# Altium PCB PCB1.PcbDoc (part 1 of 2)
Units mil, origin at the board's own origin, x right, y up, seen from the top; angles counter-clockwise.
Board outline 3937.01 x 3937.01 mil, 4 copper layers (Top Layer, Int1 (GND), Int2 (PWR), Bottom Layer), stack 61.754 mil thick; 139 components, 114 nets, 575 pads, 284 vias.
Unrouted connection lines stored in the file: 12.
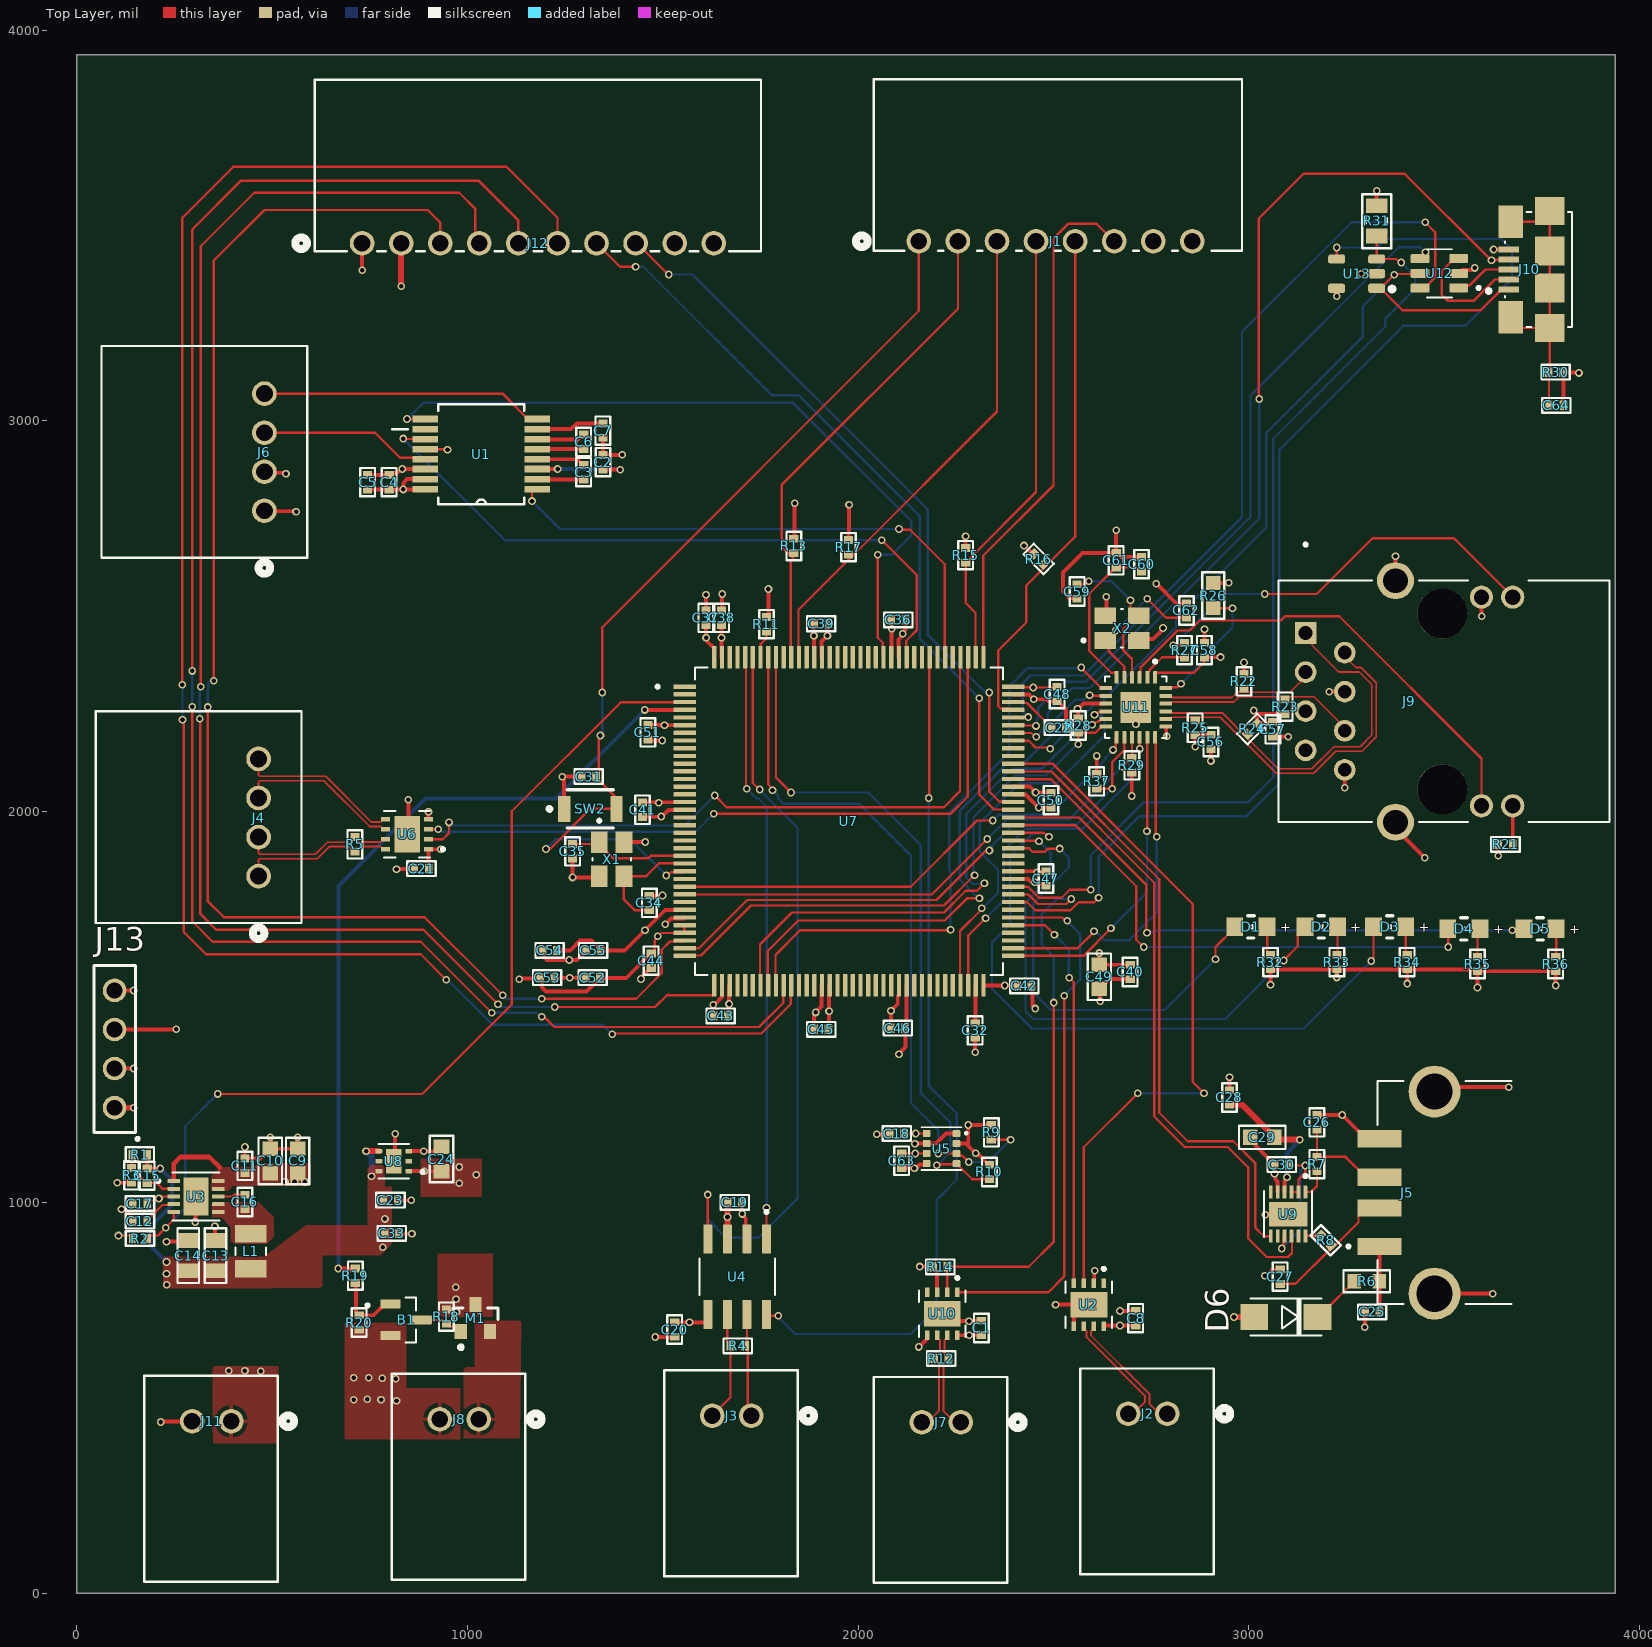
[diagram p0: Top Layer view]
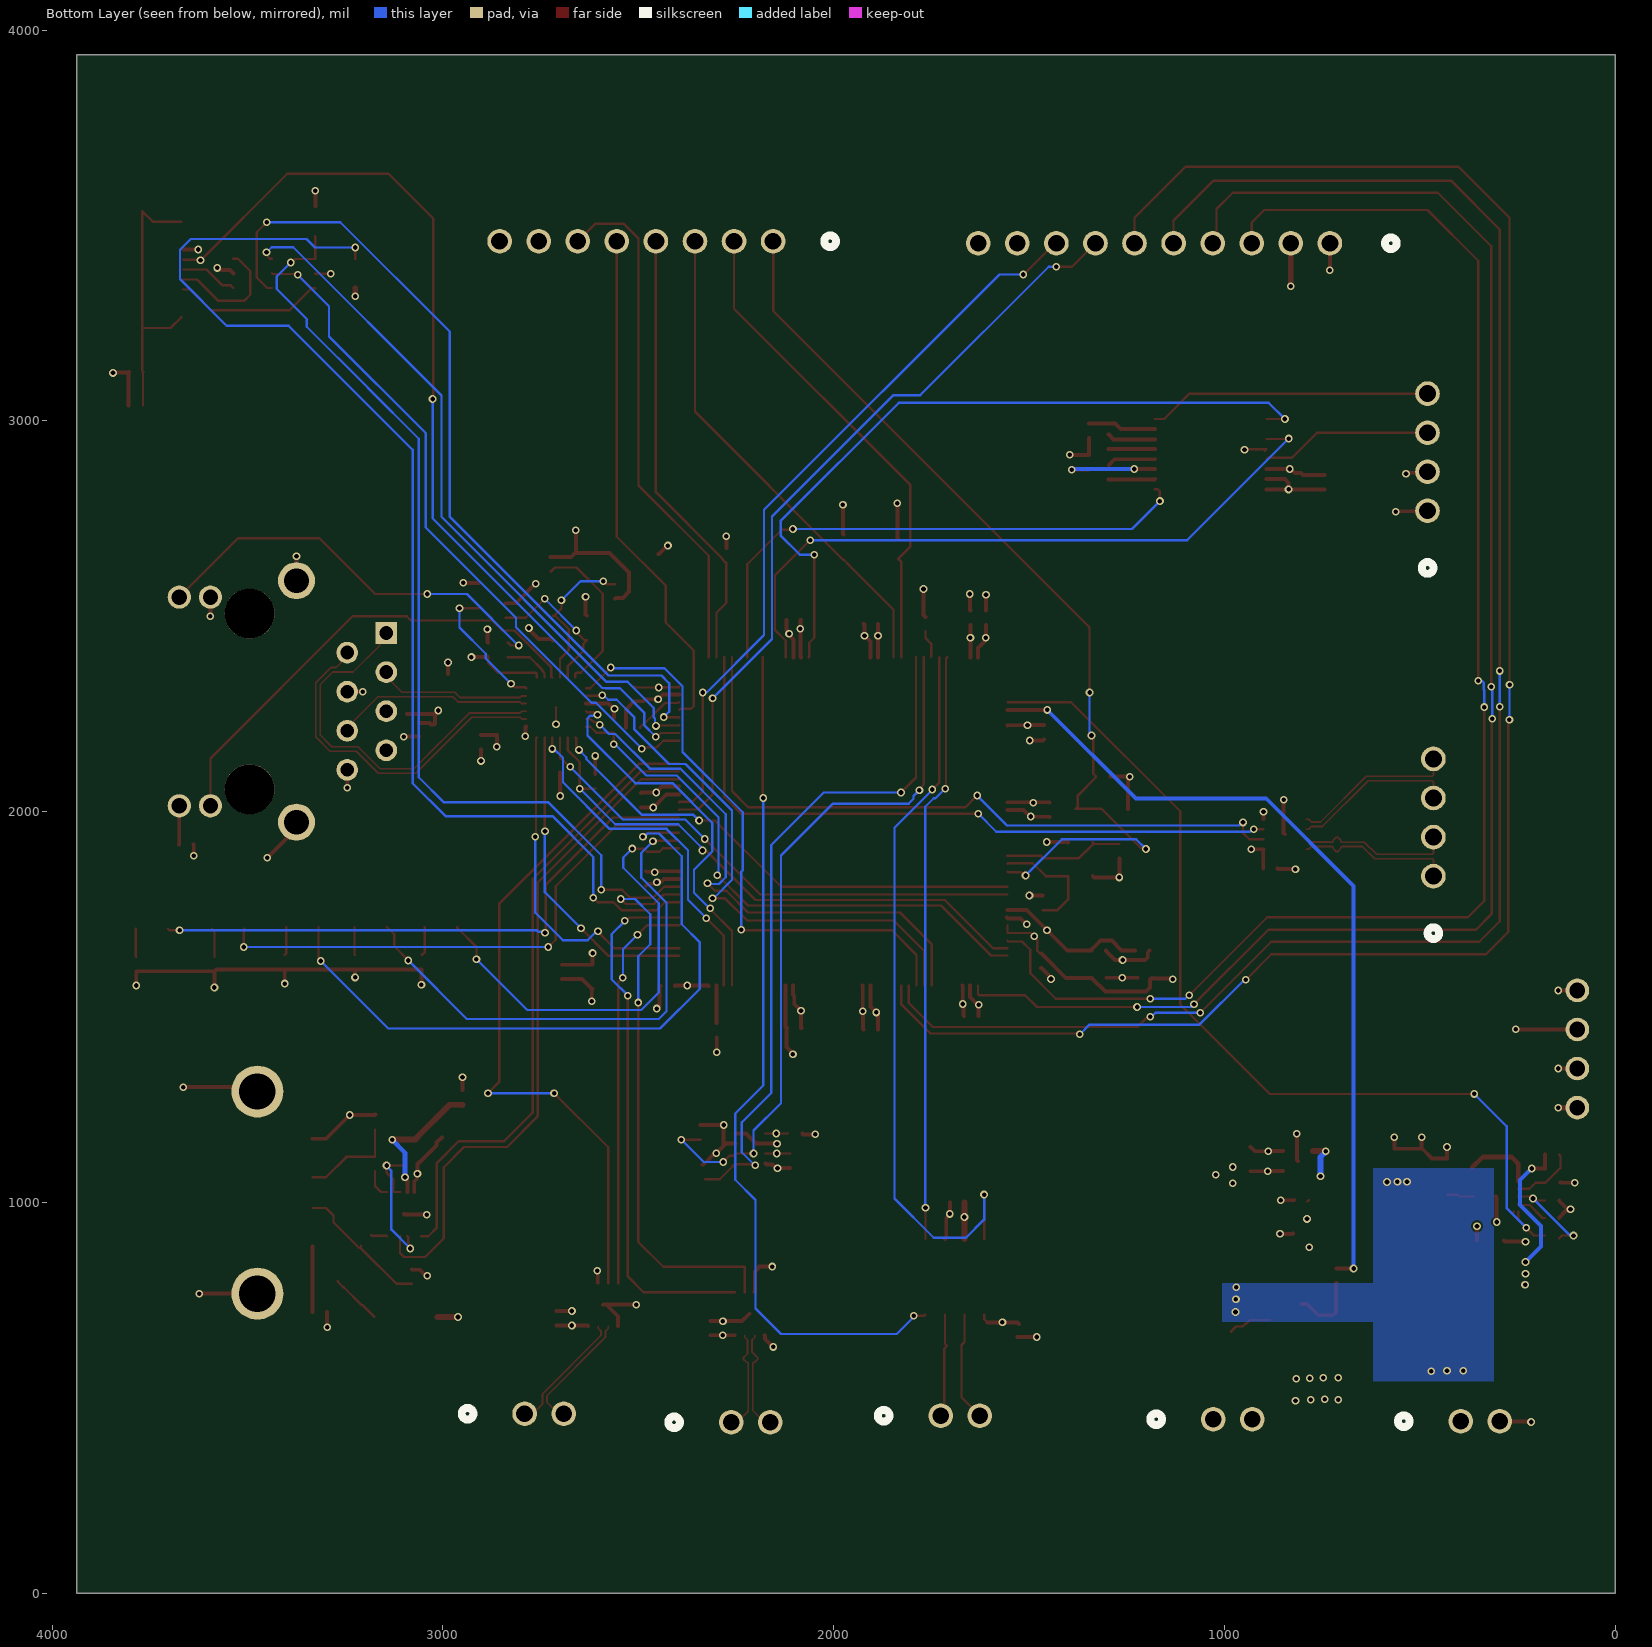
[diagram p1: Bottom Layer view, seen from below]
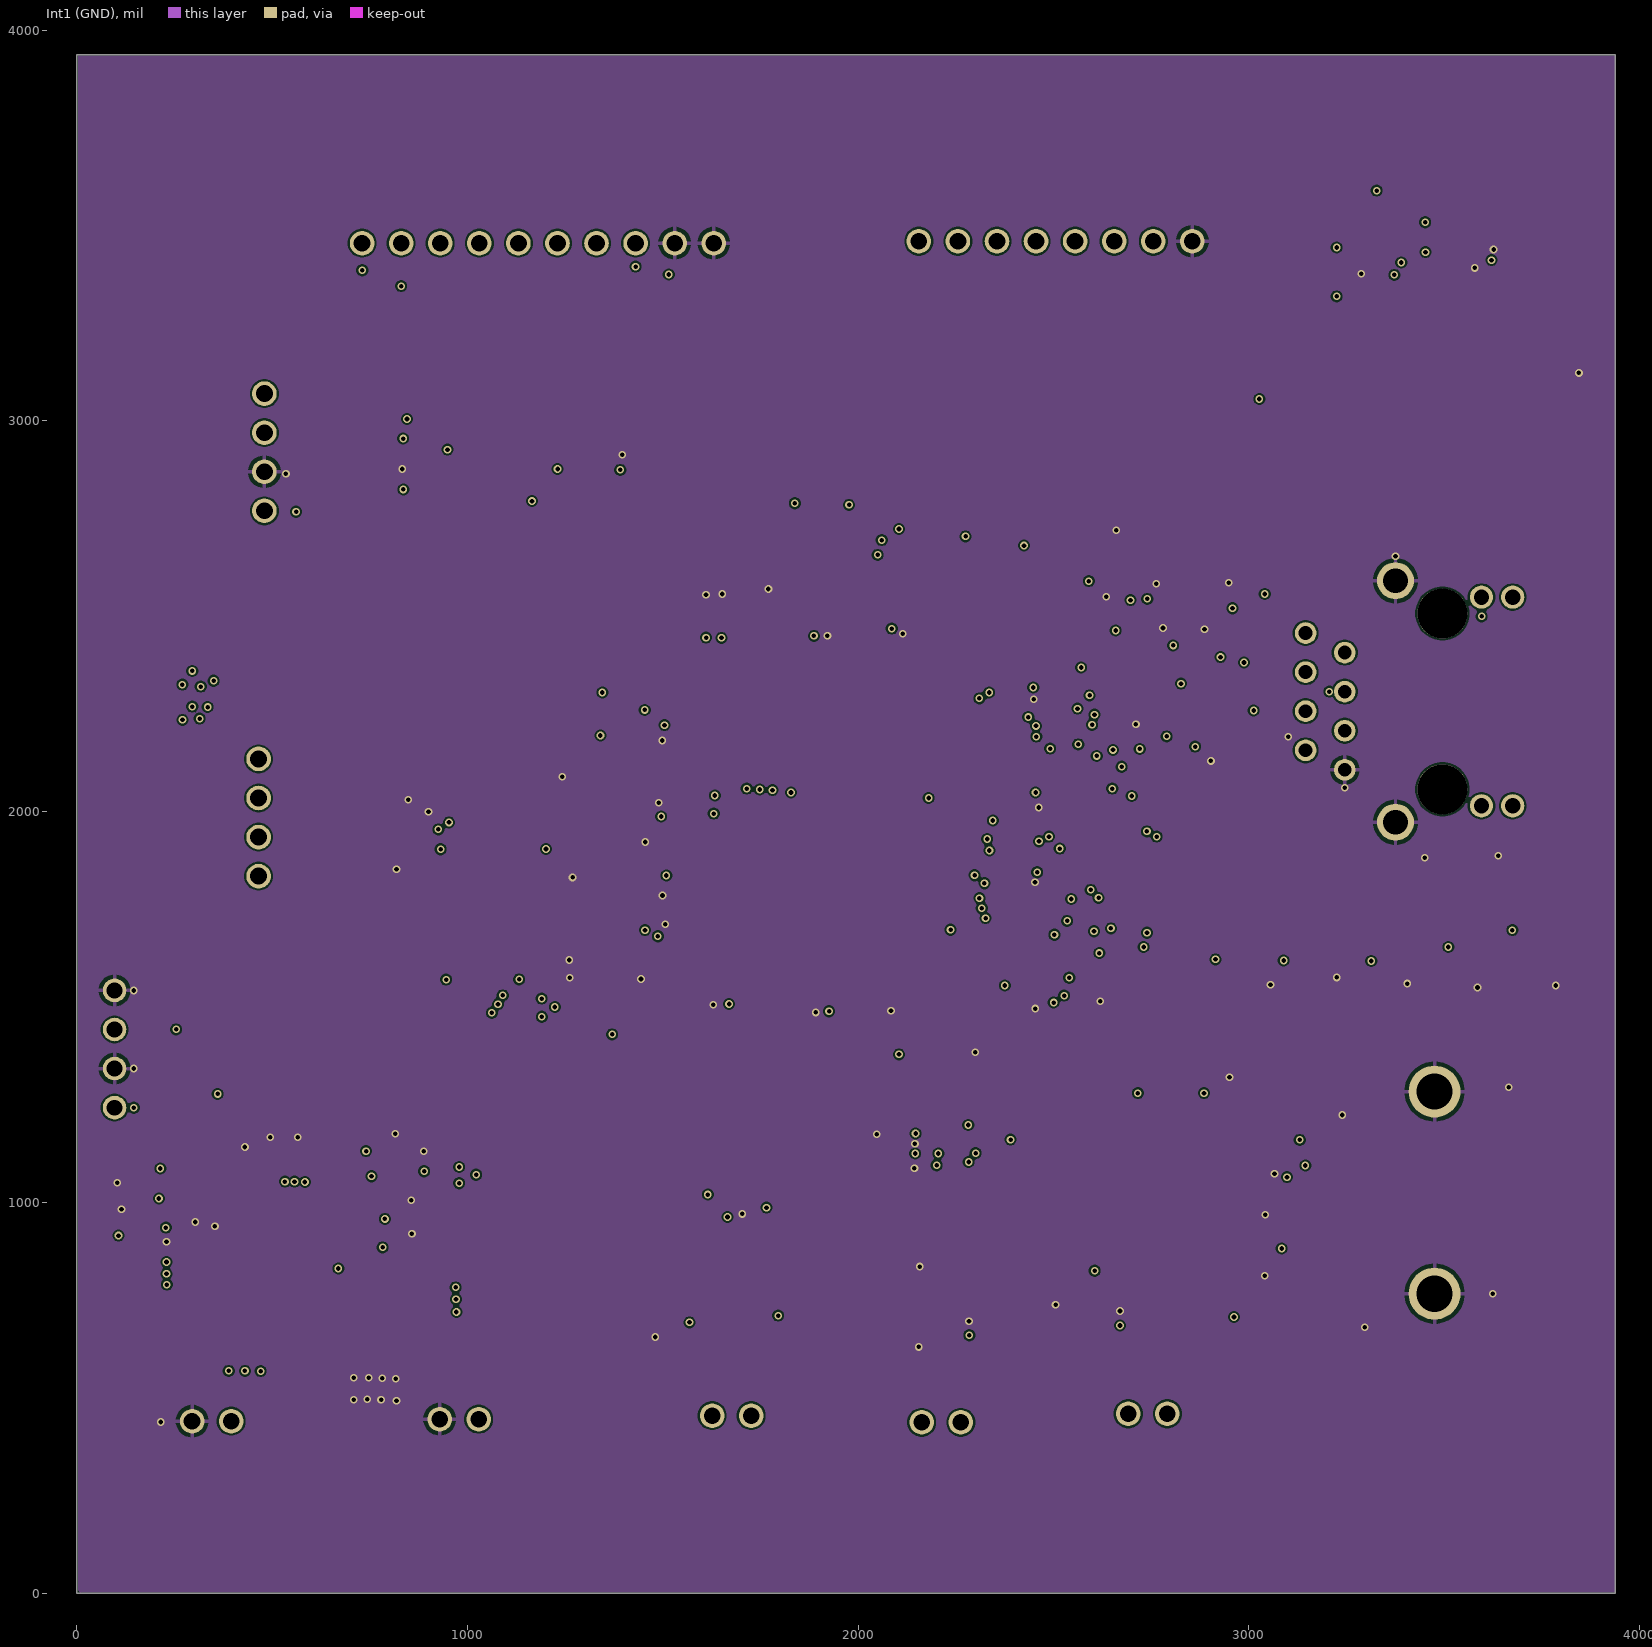
[diagram p2: Int1 (GND)]
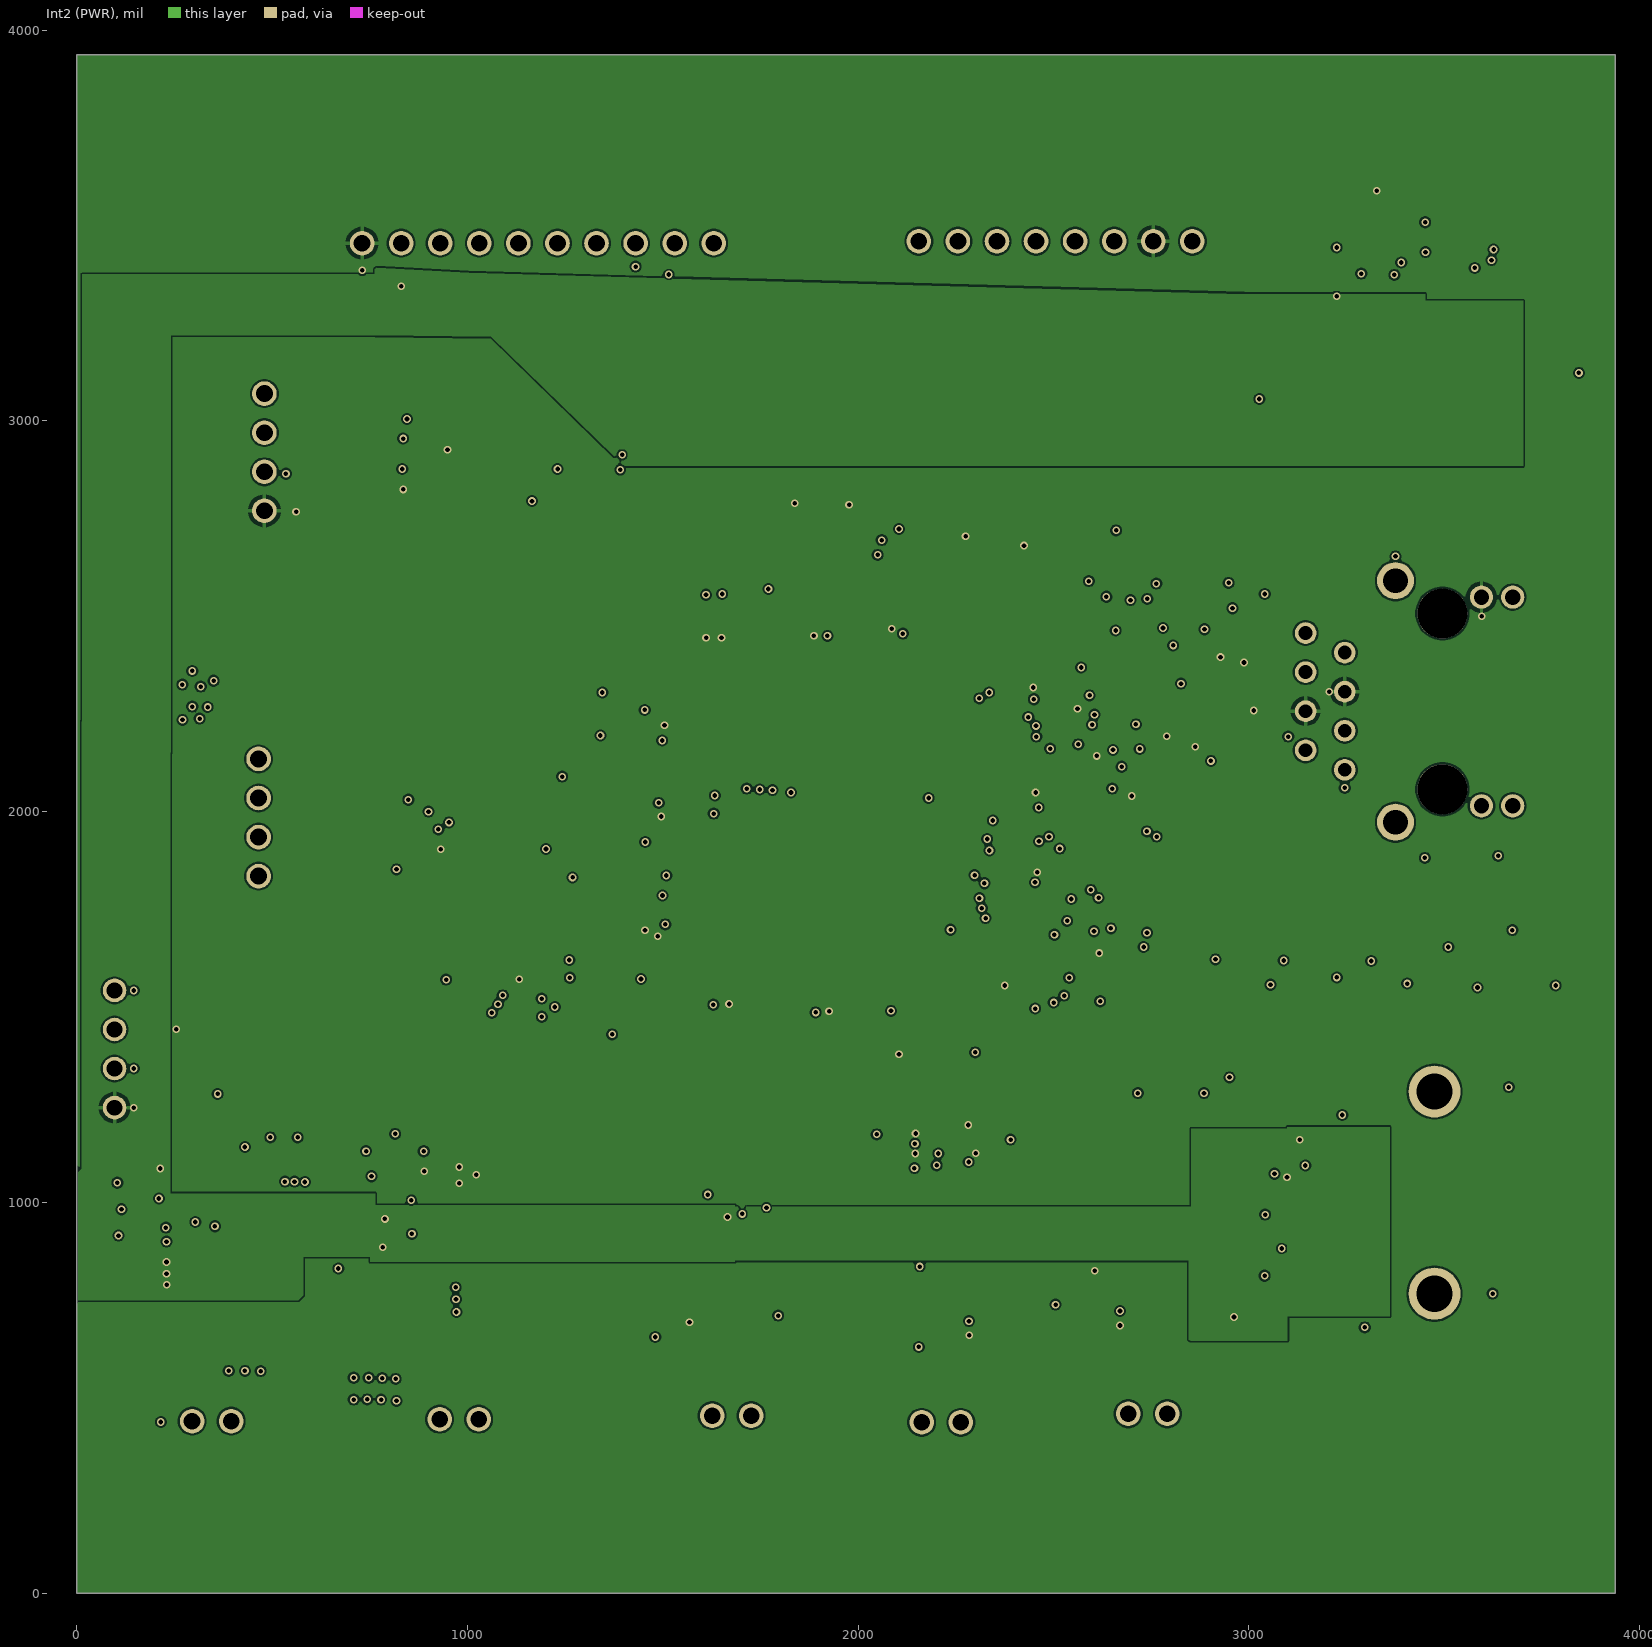
[diagram p3: Int2 (PWR)]
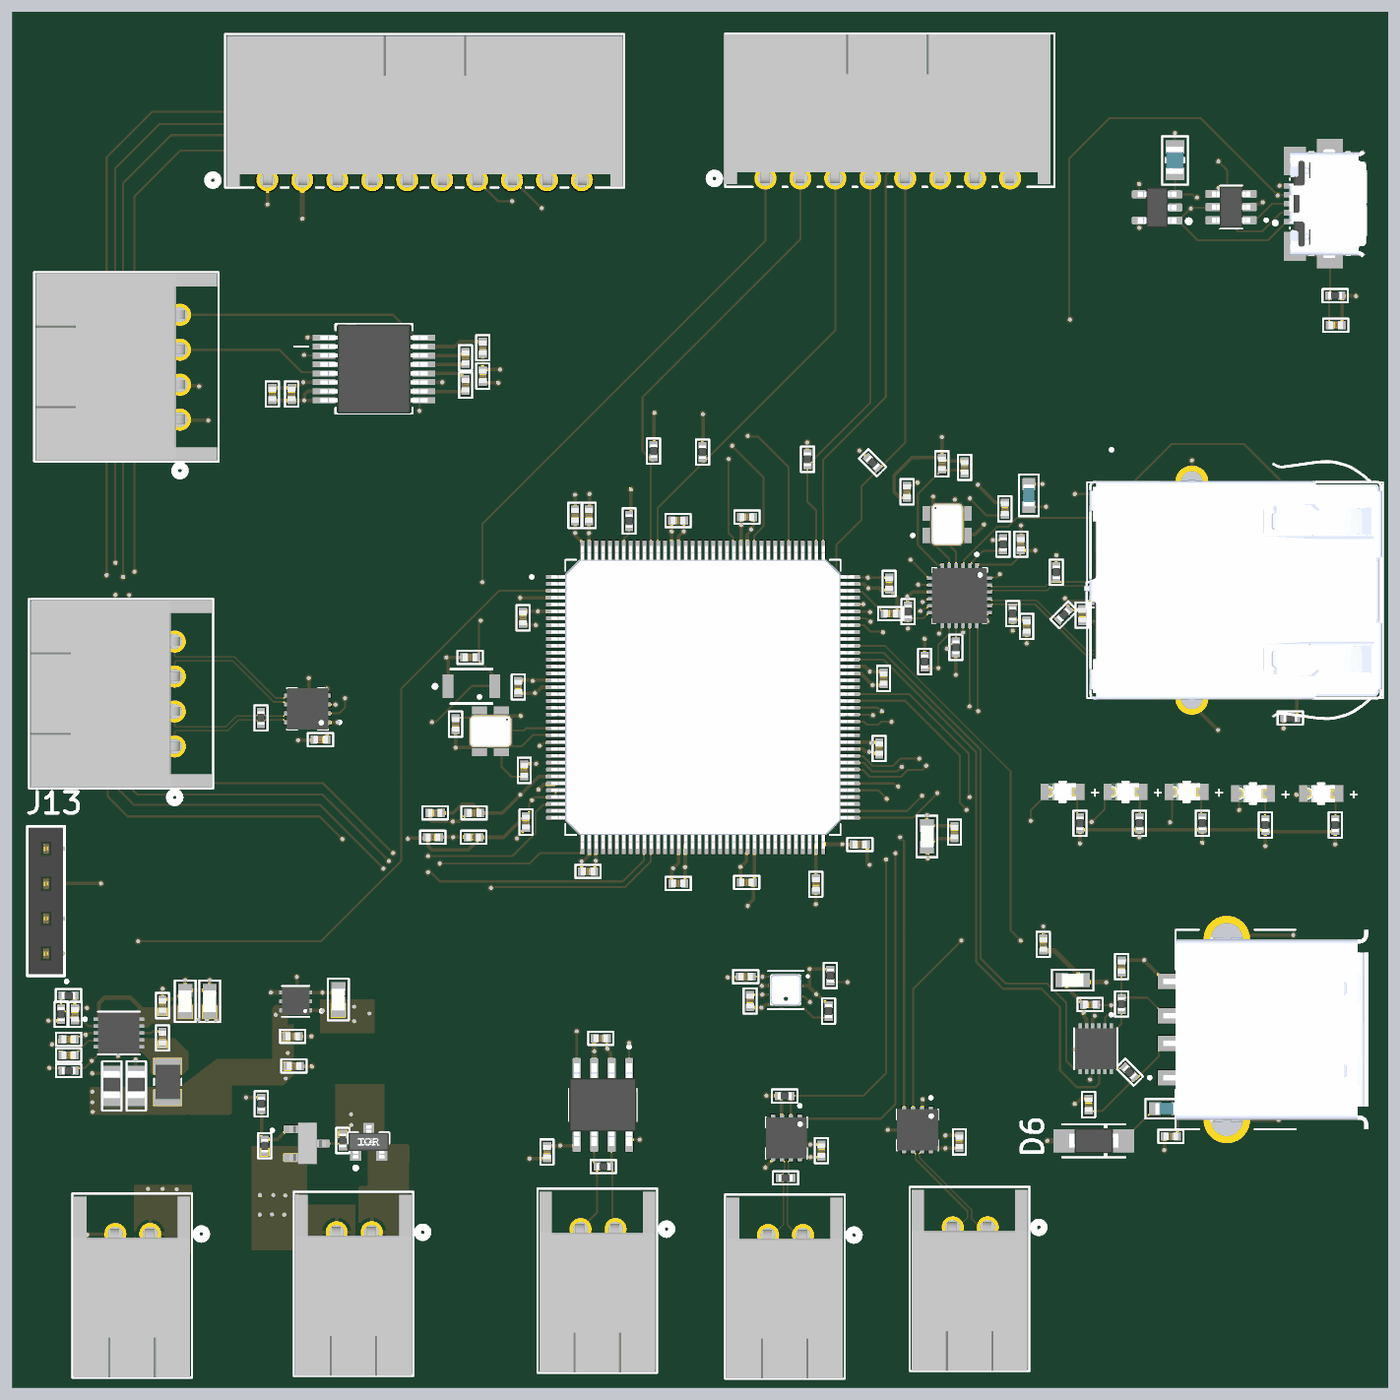
[diagram p5: 3D render of the assembled board from above, using the file's embedded part models]

## Layer stack, top to bottom
Top Solder: solder mask 1, SM-001, Dk 4
Top Layer: signal copper 1.378
Dielectric 1: prepreg 3.9098, 3313, Dk 4.3
Int1 (GND): signal copper 0.689
Dielectric 3: core 49.8, Core-039, Dk 4.8
Int2 (PWR): signal copper 0.689
Dielectric 5: prepreg 3.9098, 3313, Dk 4.3
Bottom Layer: signal copper 1.378
Bottom Solder: solder mask 1, SM-001, Dk 4

## Board outline
0,0 0,3937.01 3937.01,3937.01 3937.01,0

## Design rules (kind name [scope] priority, off if disabled: settings)
Clearance Clearance_1 [InAnyDifferentialPair vs InPolygon] p1: gap=5 ignorepadtopadclearanceinfootprint=FALSE
Clearance [All] p2: gap=5 ignorepadtopadclearanceinfootprint=FALSE except(6: Arc-Arc Arc-Track Arc-SMDPad Arc-THPad Arc-Via Arc-Fill Arc-Poly Arc-Region Arc-Text Arc-Hole Track-Track Track-SMDPad Track-THPad Track-Via Track-Fill Track-Poly Track-Region Track-Text Track-Hole)
DiffPairsRouting [All] p1: maxlimit=7 minlimit=7 mostfreqgap=7 toplayer_minwidth=4.44 toplayer_maxwidth=4.44 toplayer_prefwidth=4.44 bottomlayer_minwidth=4.44 bottomlayer_maxwidth=4.44 bottomlayer_prefwidth=4.44 impedanceprofiledriven=TRUE impedanceprofileid={4BCA3B1C-A031-4699-B57C-D42D30BC86EE} impedanceprofilevalue=100.000000 maxuncoupledlength=500
HoleSize [All] p1: absolutevalues=TRUE maxlimit=300 minlimit=1 maxpercent=80.000 minpercent=20.000
HoleToHoleClearance [All] p1: gap=0 allowstackedmicrovias=TRUE
MinimumSolderMaskSliver [All] p1: minsoldermaskwidth=0
PolygonConnect [All] p1: thpad.connectstyle=Relief thpad.reliefconductorwidth=10 thpad.reliefentries=4 thpad.polygonreliefangle="90 Angle" thpad.airgapwidth=10 smdpad.connectstyle=Direct smdpad.reliefconductorwidth=10 smdpad.reliefentries=4 smdpad.polygonreliefangle="90 Angle" smdpad.airgapwidth=10 via.connectstyle=Direct via.reliefconductorwidth=10 via.reliefentries=4 via.polygonreliefangle="90 Angle" via.airgapwidth=10
RoutingVias [All] p1: holewidth=12 width=5 viastyle="Through Hole" minholewidth=12 minwidth=5 maxholewidth=12 maxwidth=5
SilkToSilkClearance [All] p1: silktosilkclearance=0
SilkToSolderMaskClearance [IsPad] p1: minsilkscreentomaskgap=0 clearancetoexposedcopper=TRUE
SolderMaskExpansion [All] p1: expansion=0 istentingtop=FALSE
SupplyNets "Schematic Supply Nets_5" [InNet('3.3V')] p1: voltage=0.000
SupplyNets "Schematic Supply Nets_2" [InNet('GND')] p2: voltage=0.000
SupplyNets "Schematic Supply Nets_1" [InNet('12VIN')] p3: voltage=0.000
SupplyNets "Schematic Supply Nets" [InNet('5V')] p4: voltage=0.000
Width [All] p1: maxlimit=50 minlimit=5.94 preferedwidth=5.94 impedanceprofiledriven=TRUE impedanceprofileid={85FC55CB-15A4-44C9-93E0-144C80E212F8} impedanceprofilevalue=50.000000 minimp=50.000000 maximp=50.000000 favimp=50.000000
24 further rules are at their usual default settings.

## Classes and differential pairs
net class 485_TX_N: RS485_TX_N RS485_TX_P
net class 485_RX_P: RS485_RX_P
net class 485_RX_N: RS485_RX_N
net class 422_TX: TX_N TX_P
net class 422_RX: RX_N RX_P
differential pair class DIF_100: RD RS485_RX RS485_TX RX TD TX
net class ETH_TX: RD_N RD_P TD_N TD_P
component class USB_OTG: C64 J10 R30 R31 U12 U13
component class TLV75533PDRVR: C23 C24 C33 U8
component class STM32: C22 C31 C32 C36 C37 C38 C39 C40 C41 C42 C43 C44 C45 C46 C47 C48 C49 C50 C51 C52 C53 C54 C55 D1 D2 D3 D4 D5 J1 J12 J13 R11 R13 R15 R16 R17 R32 R33 R34 R35 R36 SW2 U7
component class Sheet1: B1 J8 M1 R18 R19 R20
component class RT723: C9 C10 C11 C12 C13 C14 C15 C16 C17 J11 L1 R1 R2 R3 U3
component class RS485_2: C1 J7 R12 R14 U10
component class RS485: C8 J2 U2
component class RS422: C21 J4 R5 U6
component class RS232: C2 C3 C4 C5 C6 C7 J6 U1
component class RH100: C34 C35 X1
component class LAN8742AI-CZ-TR: C56 C57 C58 C59 C60 C61 C62 J9 R21 R22 R23 R24 R25 R26 R27 R28 R29 R37 U11 X2
component class FT234XD-R: C25 C26 C27 C28 C29 C30 D6 J5 R6 R7 R8 U9
component class CANBUS: C19 C20 J3 R4 U4
component class BME280: C18 C63 R9 R10 U5
differential pair RS485_TX: +RS485_TX_P -RS485_TX_N
differential pair RS485_RX: +RS485_RX_P -RS485_RX_N
differential pair TX: +TX_P -TX_N
differential pair RX: +RX_P -RX_N
differential pair RD: +RD_P -RD_N
differential pair TD: +TD_P -TD_N

## Components (designator, comment, footprint, x,y, rotation, side; value= is the part's Value field where it differs from the comment)
B1 "MMBT3904" "MMBT3904 RFG" 842.5,699 r0 top
C1 "0402 capacitor" "402 CAPACITOR - DUPLICATE" 2315,678.5 r270 top value=0.1µF
C2 "0402 capacitor" "402 CAPACITOR - DUPLICATE" 1346.46,2894.68 r270 top value=0.1µF
C3 "0402 capacitor" "402 CAPACITOR - DUPLICATE" 1297.24,2868.9 r270 top value=0.1µF
C4 "0402 capacitor" "402 CAPACITOR - DUPLICATE" 799.21,2843.31 r270 top value=0.1µF
C5 "0402 capacitor" "402 CAPACITOR - DUPLICATE" 744.09,2843.31 r270 top value=0.1µF
C6 "0402 capacitor" "402 CAPACITOR - DUPLICATE" 1297.24,2946.65 r270 top value=0.1µF
C7 "0402 capacitor" "402 CAPACITOR - DUPLICATE" 1346.46,2975.39 r90 top value=0.1µF
C8 "0402 capacitor" "402 CAPACITOR - DUPLICATE" 2710,703.5 r270 top value=0.1µF
C9 "0603 CAPACİTOR" "603 CAPACITOR" 565,1106.1 r270 top value=10µF
C10 "0603 CAPACİTOR" "603 CAPACITOR" 495,1106.1 r270 top value=10µF
C11 "0402 capacitor" "402 CAPACITOR - DUPLICATE" 430,1093.5 r270 top value=0.1µF
C12 "0402 capacitor" "402 CAPACITOR - DUPLICATE" 161.42,951.77 r180 top value=3.9nF
C13 "0805 capacitor" "805 CAPACITOR - DUPLICATE" 355,863.58 r270 top value=22µF
C14 "0805 capacitor" "805 CAPACITOR - DUPLICATE" 285,863.58 r270 top value=22µF
C15 "0402 capacitor" "402 CAPACITOR - DUPLICATE" 180,1068.5 r270 top value=15nF
C16 "0402 capacitor" "402 CAPACITOR - DUPLICATE" 430,1001 r90 top value=0.1µF
C17 "0402 capacitor" "402 CAPACITOR - DUPLICATE" 161.42,997.05 r180 top value=1µF
C18 "0402 capacitor" "402 CAPACITOR - DUPLICATE" 2098.62,1176.18 r0 top value=100nF
C19 "0402 capacitor" "402 CAPACITOR - DUPLICATE" 1684.06,1000 r180 top value=0.1µF
C20 "0402 capacitor" "402 CAPACITOR - DUPLICATE" 1530,674.5 r90 top value=0.1µF
C21 "0402 capacitor" "402 CAPACITOR - DUPLICATE" 882.09,1854.33 r180 top value=0.1µF
C22 "0402 capacitor" "402 CAPACITOR - DUPLICATE" 2513.5,2215 r0 top value=2.2µF
C23 "0402 capacitor" "402 CAPACITOR - DUPLICATE" 802.61,1005.59 r180 top value=1µF
C24 "0603 CAPACİTOR" "603 CAPACITOR" 933.07,1110.83 r270 top value=10µF
C25 "0402 capacitor" "402 CAPACITOR - DUPLICATE" 3315.16,719.49 r180 top value=10nF
C26 "0402 capacitor" "402 CAPACITOR - DUPLICATE" 3173.86,1205 r90 top value=47pF
C27 "0402 capacitor" "402 CAPACITOR - DUPLICATE" 3080,810 r270 top value=47pF
C28 "0402 capacitor" "402 CAPACITOR - DUPLICATE" 2950,1268.5 r270 top value=100nF
C29 "0603 CAPACİTOR" "603 CAPACITOR" 3033.86,1166.5 r0 top value=4.7µF
C30 "0402 capacitor" "402 CAPACITOR - DUPLICATE" 3083.86,1096.5 r0 top value=100nF
C31 "0402 capacitor" "402 CAPACITOR - DUPLICATE" 1310,2090 r0 top value=0.1µF
C32 "0402 capacitor" "402 CAPACITOR - DUPLICATE" 2299.21,1440.16 r90 top value=2.2µF
C33 "0402 capacitor" "402 CAPACITOR - DUPLICATE" 806.11,920.59 r180 top value=0.1µF
C34 "0402 capacitor" "402 CAPACITOR - DUPLICATE" 1465,1766.5 r270 top value=15pF
C35 "0402 capacitor" "402 CAPACITOR - DUPLICATE" 1268.7,1898.62 r90 top value=15pF
C36 "0402 capacitor" "402 CAPACITOR - DUPLICATE" 2102.36,2491.14 r0 top value=100nF
C37 "0402 capacitor" "402 CAPACITOR - DUPLICATE" 1610,2496 r90 top value=100nF
C38 "0402 capacitor" "402 CAPACITOR - DUPLICATE" 1650.2,2496 r90 top value=100nF
C39 "0402 capacitor" "402 CAPACITOR - DUPLICATE" 1904.92,2481 r0 top value=100nF
C40 "0402 capacitor" "402 CAPACITOR - DUPLICATE" 2695.87,1589.76 r270 top value=100nF
C41 "0402 capacitor" "402 CAPACITOR - DUPLICATE" 1447.83,2004.92 r90 top value=100nF
C42 "0402 capacitor" "402 CAPACITOR - DUPLICATE" 2425.2,1554.13 r0 top value=100nF
C43 "0402 capacitor" "402 CAPACITOR - DUPLICATE" 1647.64,1477.36 r180 top value=100nF
C44 "0402 capacitor" "402 CAPACITOR - DUPLICATE" 1470,1618.5 r270 top value=100nF
C45 "0402 capacitor" "402 CAPACITOR - DUPLICATE" 1905.51,1442.91 r180 top value=100nF
C46 "0402 capacitor" "402 CAPACITOR - DUPLICATE" 2101.38,1445.87 r180 top value=100nF
C47 "0402 capacitor" "402 CAPACITOR - DUPLICATE" 2480.32,1828.94 r270 top value=100nF
C48 "0402 capacitor" "402 CAPACITOR - DUPLICATE" 2508.86,2301.18 r270 top value=100nF
C49 "0603 CAPACİTOR" "603 CAPACITOR" 2617.13,1577.36 r90 top value=10µF
C50 "0402 capacitor" "402 CAPACITOR - DUPLICATE" 2493.11,2029.53 r270 top value=100nF
C51 "0402 capacitor" "402 CAPACITOR - DUPLICATE" 1461.61,2202.95 r270 top value=100nF
C52 "0402 capacitor" "402 CAPACITOR - DUPLICATE" 1320,1575 r0 top value=100nF
C53 "0402 capacitor" "402 CAPACITOR - DUPLICATE" 1203.5,1575 r180 top value=1µF
C54 "0402 capacitor" "402 CAPACITOR - DUPLICATE" 1210,1645 r0 top value=1µF
C55 "0402 capacitor" "402 CAPACITOR - DUPLICATE" 1321.5,1645 r0 top value=100nF
C56 "0402 capacitor" "402 CAPACITOR - DUPLICATE" 2902.56,2178.35 r270 top value=100nF
C57 "0402 capacitor" "402 CAPACITOR - DUPLICATE" 3061.02,2210.83 r90 top value=100nF
C58 "0402 capacitor" "402 CAPACITOR - DUPLICATE" 2885.83,2413.39 r270 top value=100nF
C59 "0402 capacitor" "402 CAPACITOR - DUPLICATE" 2560,2563.5 r90 top value=15pF
C60 "0402 capacitor" "402 CAPACITOR - DUPLICATE" 2725,2633.5 r270 top value=470pF
C61 "0402 capacitor" "402 CAPACITOR - DUPLICATE" 2660,2643.5 r270 top value=1µF
C62 "0402 capacitor" "402 CAPACITOR - DUPLICATE" 2840,2515 r270 top value=15pF
C63 "0402 capacitor" "402 CAPACITOR - DUPLICATE" 2111.22,1106.5 r90 top value=100nF
C64 "0402 capacitor" "402 CAPACITOR - DUPLICATE" 3786.5,3040 r0 top value=4.7nF
D1 "150060RS75000" 150080GS75000 3005,1705 r0 top
D2 "150060RS75000" 150080GS75000 3185,1705 r0 top
D3 "150060RS75000" 150080GS75000 3360,1705 r0 top
D4 "150060RS75000" 150080GS75000 3550,1700 r0 top
D5 "150060RS75000" 150080GS75000 3745,1700 r0 top
D6 "diode" SS14 3094.49,706.69 r180 top
J1 "8 POS" 0901362108 2155,3460 r180 top
J2 "2 POS" 0901362102 2790,458 r0 top
J3 "2 POS" 0901362102 1725,453 r0 top
J4 "4 POS" 0901362104 465,1835 r270 top
J5 "4 POS" "4 PIN USB" 3475,1025 r90 top
J6 "4 POS" 0901362104 480,2770 r270 top
J7 "2 POS" 0901362102 2261.4,436.01 r0 top
J8 "2 POS" 0901362102 1027.5,444 r0 top
J9 "ARJM11C7-009-AB-EW2" ARJM11C7-009-AB-EW2 3495.08,2283.13 r90 top
J10 "10118192-0001LF" 10118192-0001LF 3664.69,3387.76 r90 top
J11 "0901362102" 0901362102 394,439 r0 top
J12 "10 POS" 0901362110 730,3455 r180 top
J13 "61300411821" 61300411821 96.96,1393.02 r90 top
L1 "BRL2518T2R2M" INDUCTOR_2 445,875.12 r270 top value=2.2µH
M1 "mosfet" IRLML6402 1020.1,703.84 r90 top
R1 "0402. RESİSTOR" "402 RESISTOR" 161.22,1122.05 r180 top value=99.64KΩ
R2 "0402. RESİSTOR" "402 RESISTOR" 161.42,907.48 r0 top value=100KΩ
R3 "0402. RESİSTOR" "402 RESISTOR" 139.76,1069.09 r90 top value=18KΩ
R4 "0402. RESİSTOR" "402 RESISTOR" 1691.5,633 r180 top value=120Ω
R5 "0402. RESİSTOR" "402 RESISTOR" 711.61,1916.34 r90 top value=120Ω
R6 "Ferrite Bead" "603 RESISTOR" 3301.61,798.23 r180 top value=600Ω
R7 "0402. RESİSTOR" "402 RESISTOR" 3173.86,1097.99 r270 top value=27Ω
R8 "0402. RESİSTOR" "402 RESISTOR" 3196.56,902.85 r135 top value=27Ω
R9 "0402. RESİSTOR" "402 RESISTOR" 2340.55,1179.33 r90 top value=4.7KΩ
R10 "0402. RESİSTOR" "402 RESISTOR" 2335.63,1077.76 r90 top value=4.7KΩ
R11 "0402. RESİSTOR" "402 RESISTOR" 1765,2480 r90 top value=10KΩ
R12 "0402. RESİSTOR" "402 RESISTOR" 2212.6,600.39 r180 top value=120Ω
R13 "0402. RESİSTOR" "402 RESISTOR" 1835,2680 r90 top value=10KΩ
R14 "0402. RESİSTOR" "402 RESISTOR" 2210,835 r0 top value=10KΩ
R15 "0402. RESİSTOR" "402 RESISTOR" 2275,2656.46 r90 top value=10KΩ
R16 "0402. RESİSTOR" "402 RESISTOR" 2461.61,2646.65 r135 top value=10KΩ
R17 "0402. RESİSTOR" "402 RESISTOR" 1975,2677.05 r90 top value=10KΩ
R18 "0402. RESİSTOR" "402 RESISTOR" 945.87,707.68 r270 top value=10KΩ
R19 "0402. RESİSTOR" "402 RESISTOR" 712.5,812.5 r270 top value=1KΩ
R20 "0402. RESİSTOR" "402 RESISTOR" 722.5,692.5 r270 top value=10KΩ
R21 "0402. RESİSTOR" "402 RESISTOR" 3656.69,1916.34 r0 top value=270Ω
R22 "0402. RESİSTOR" "402 RESISTOR" 2987.2,2333.46 r270 top value=49.9Ω
R23 "0402. RESİSTOR" "402 RESISTOR" 3092.52,2268.7 r90 top value=49.9Ω
R24 "0402. RESİSTOR" "402 RESISTOR" 3008.86,2211.61 r225 top value=49.9Ω
R25 "0402. RESİSTOR" "402 RESISTOR" 2862.2,2214.76 r90 top value=49.9Ω
R26 "0603 RESİSTOR" "603 RESISTOR" 2908.46,2553.15 r90 top value=12.1KΩ
R27 "0402. RESİSTOR" "402 RESISTOR" 2835,2413.5 r90 top value=270Ω
R28 "0402. RESİSTOR" "402 RESISTOR" 2562.99,2220.47 r270 top value=4.7KΩ
R29 "0402. RESİSTOR" "402 RESISTOR" 2700,2118.5 r90 top value=10KΩ
R30 "0402. RESİSTOR" "402 RESISTOR" 3785,3125 r180 top value=1MΩ
R31 "0805 resistor" "805 RESISTOR" 3326.77,3512.01 r270 top value=4.7KΩ
R32 "0402. RESİSTOR" "402 RESISTOR" 3055,1615 r90 top value=330Ω
R33 "0402. RESİSTOR" "402 RESISTOR" 3225,1615 r90 top value=330Ω
R34 "0402. RESİSTOR" "402 RESISTOR" 3405,1615 r90 top value=330Ω
R35 "0402. RESİSTOR" "402 RESISTOR" 3585,1610 r90 top value=330Ω
R36 "0402. RESİSTOR" "402 RESISTOR" 3785,1610 r90 top value=330Ω
R37 "0402. RESİSTOR" "402 RESISTOR" 2610.24,2077.56 r270 top value=10KΩ
SW2 "B3U-1000P" OMRON-B3U-1000_V 1313.98,2006.89 r0 top
U1 "MAX3221EIDBR" MAX3221EIDBR 1035,2915 r180 top
U2 "SN65HVD78DRBT" ?#1 2590,738 r270 top
U3 "RT7235GQW" RT7235GQW 305,1015 r0 top
U4 "MCP2562FD-E/SN" MCP2562FD-E/SN 1690,809.65 r270 top
U5 "BME280" BME280 2213.19,1137.8 r0 top
U6 "SP3077EEN-L" ?#2 845.12,1942.2 r180 top
U7 "STM32F437ZIT6" STM32F437ZIT6 1976.18,1975.39 r0 top
U8 "TLV75533PDRVR" TLV75533PDRVR 811.11,1105.59 r180 top
U9 "FT234XD-R" FT234XD-R 3100,970 r270 top
U10 "SN65HVD78DRBT" ?#1 2215,715 r270 top
U11 "LAN8742AI-CZ-TR" LAN8742AI-CZ-TR 2710.47,2266.77 r270 top
U12 "USBLC6-2SC6" USBLC6-2SC6 3487.2,3377.95 r180 top
U13 "STMPS2141STR" STMPS2141STR 3275.59,3376.97 r180 top
X1 "RH100-25.000-10-F-1010-EXT-TR" RH100-25.000-10-F-1010-EXT-TR 1368.5,1878.31 r270 top
X2 "RH100-25.000-10-F-1010-EXT-TR" RH100-25.000-10-F-1010-EXT-TR 2675,2470 r0 top

## Footprints (in the part's own frame and the unit in brackets; to place one, negate y for a bottom-side part, rotate by r counter-clockwise, add the part's x,y. Pads: shape width x height; smd on the part's side, far side on the other; paste and mask are expansions set on the pad)
"4 PIN USB" [mm]
  rect 1.12x2.88 smd mask+0.05: 01(-3.5,3.58) 02(-1,3.58) 03(1,3.58) 04(3.5,3.58)
  round 3.376 hole 2.36: SH(-6.57,0) SH(6.57,0)
  silkscreen extent -7.25,-5 7.25,5.7, body extent -7.25,-10.28 7.25,4.6, height 7.74
"402 CAPACITOR - DUPLICATE" [mm]
  rect 0.51x0.6 smd mask+0.05: 1(-0.47,0) 2(0.47,0)
  silkscreen extent -0.92,-0.48 0.92,0.48, body extent -0.52,-0.28 0.52,0.28, height 0.56
"402 RESISTOR" [mm]
  rect 0.51x0.6 smd paste+0 mask+0.05: 1(-0.47,0) 2(0.47,0)
  silkscreen extent -0.92,-0.48 0.92,0.48, body extent -0.5,-0.25 0.5,0.25, height 0.4
"603 CAPACITOR" [mm]
  rect 0.94x1.02 smd paste+0 mask+0.05: 1(-0.79,0) 2(0.79,0)
  silkscreen extent -1.51,-0.76 1.51,0.76, body extent -0.8,-0.51 0.8,0.49, height 0.83
"603 RESISTOR" [mm]
  rect 0.89x0.93 smd paste+0 mask+0.05: 1(-0.814,0) 2(0.814,0)
  silkscreen extent -1.51,-0.71 1.51,0.71, body extent -0.8,-0.4 0.8,0.4, height 0.55
"805 CAPACITOR - DUPLICATE" [mm]
  rect 0.96x1.38 smd: 1(-0.98,0) 2(0.98,0)
  silkscreen extent -1.78,-0.7 1.78,0.7, body extent -1.1,-0.64 0.9,0.62, height 0.7
"805 RESISTOR" [mm]
  rect 0.96x1.38 smd: 1(-0.98,0) 2(0.98,0)
  silkscreen extent -1.74,-0.94 1.78,0.94, body extent -1,-0.63 1,0.63, height 0.6
150080GS75000 [mm]
  rect 1.1x1.2 smd: 1(-1.05,0) 2(1.05,0)
  silkscreen extent -0.21,-0.72 0.22,0.72, body extent -1,-0.63 1,0.63, height 0.7
10118192-0001LF [mm]
  rect 0.4x1.35 smd: 1(-1.3,0) 2(-0.65,0) 3(0,0) 4(0.65,0) 5(1.3,0)
  rect 2.1x1.6 smd: SH1(-3.1,-0.125) SH2(3.1,-0.125)
  rect 1.8x1.9 smd: SH3(-3.8,-2.675) SH6(3.8,-2.675)
  rect 1.9x1.9 smd: SH4(-1.2,-2.675) SH5(1.2,-2.675)
  silkscreen extent -3.75,-4.13 3.75,1.4, body extent -3.96,-5.4 3.96,0.27, height 2.5
0901362102 [mil]
  round 63 hole 43: 1(1,1) 2(-99,1)
  silkscreen extent -222,-410 162,117, body extent -217,-409 115,108, height 284
0901362104 [mil]
  round 63 hole 43: 1(0,0) 2(-100,0) 3(-200,0) 4(-300,0)
  silkscreen extent -422,-417 161,110, body extent -417,-412 115,106, height 284
0901362108 [mil]
  round 63 hole 43: 1(0,0) 2(-100,0) 3(-200,0) 4(-300,0) 5(-400,0) 6(-500,0) 7(-600,0) 8(-700,0)
  silkscreen extent -827,-415 161,24, body extent -815,-413 117,17, height 284
0901362110 [mil]
  round 63 hole 43 mask+4.02: 1(0,0) 2(-100,0) 3(-200,0) 4(-300,0) 5(-400,0) 6(-500,0) 7(-600,0) 8(-700,0) 9(-800,0) 10(-900,0)
  silkscreen extent -1021,-418 171,21, body extent -1017,-413 115,17, height 284
61300411821 [mm]
  round 1.53 hole 1.02: 1(-3.823,0.013) 2(-1.283,0.013) 3(1.257,0.013) 4(3.797,0.013)
  silkscreen extent -5.95,-1.59 5.42,1.36, body extent -5.34,-1.24 5.32,1.26, height 8.52
ARJM11C7-009-AB-EW2 [mm]
  rect 1.408x1.408 / inner round 1.408 / far side rect 1.408x1.408 hole 0.9: 1(4.42,8.89)
  round 1.408 hole 0.9: 2(3.15,6.35) 3(1.88,8.89) 4(0.61,6.35) 5(-0.66,8.89) 6(-1.93,6.35) 7(-3.2,8.89) 8(-4.47,6.35)
  round 1.508 hole 1: 9(-6.81,-2.54) 10(-6.81,-4.57) 11(6.76,-2.54) 12(6.76,-4.57)
  round 2.4 hole 1.6: S1(-7.875,3.05) S2(7.825,3.05)
  round 3.25 hole 3.25 unplated: ""(-5.74,0) ""(5.69,0)
  silkscreen extent -7.88,-10.85 10.27,10.65, body extent -9.47,-10.79 9.42,10.85, height 15.3
BME280 [mm]
  rrect25% 0.49x0.45 smd paste+0 mask+0.05: 1(0.97,0.975) 2(0.97,0.325) 3(0.97,-0.325) 4(0.97,-0.975) 5(-0.97,-0.975) 6(-0.97,-0.325) 7(-0.97,0.325) 8(-0.97,0.975)
  silkscreen extent -1.3,-1.39 1.65,1.39, body extent -1.25,-1.25 1.25,1.25, height 1
FT234XD-R [mm]
  rrect25% 0.84x0.25 smd: 1(-1.435,1.125) 2(-1.435,0.675) 3(-1.435,0.225) 4(-1.435,-0.225) 5(-1.435,-0.675) 6(-1.435,-1.125) 7(1.435,-1.125) 8(1.435,-0.675) 9(1.435,-0.225) 10(1.435,0.225) 11(1.435,0.675) 12(1.435,1.125)
  rect 1.6x2.5 smd paste-2: 13(0,0)
  silkscreen extent -2.57,-1.57 1.5,1.57, body extent -1.5,-1.5 1.5,1.5, height 0.8
INDUCTOR_2 [mm]
  rect 1.14x2.02 smd paste+0 mask+0.05: 1(-1.14,0) 2(1.14,0)
  silkscreen extent -0.25,-1 0.25,1, body extent -1.25,-0.9 1.25,0.9, height 1.2
IRLML6402 [mm]
  rect 0.972x0.802 smd paste+0 mask+0: 1(-0.885,0.95) 2(-0.885,-0.95) 3(0.885,0)
  silkscreen extent -2.02,-1.46 0.65,1.46, body extent -1.2,-1.46 1.2,1.46, height 1.12
LAN8742AI-CZ-TR [mm]
  rrect25% 0.81x0.26 smd paste+0 mask+0.05: 1(-1.95,1.25) 2(-1.95,0.75) 3(-1.95,0.25) 4(-1.95,-0.25) 5(-1.95,-0.75) 6(-1.95,-1.25) 13(1.95,-1.25) 14(1.95,-0.75) 15(1.95,-0.25) 16(1.95,0.25) 17(1.95,0.75) 18(1.95,1.25)
  rrect25% 0.26x0.81 smd paste+0 mask+0.05: 7(-1.25,-1.95) 8(-0.75,-1.95) 9(-0.25,-1.95) 10(0.25,-1.95) 11(0.75,-1.95) 12(1.25,-1.95) 19(1.25,1.95) 20(0.75,1.95) 21(0.25,1.95) 22(-0.25,1.95) 23(-0.75,1.95) 24(-1.25,1.95)
  rect 2x2 smd paste-0.46 mask+0.05: 25(0,0)
  silkscreen extent -3.08,-2 2,2, body extent -2,-2 2,2, height 1
MAX3221EIDBR [mil]
  rect 65x17 smd: 1(-143,90) 2(-143,64) 3(-143,38) 4(-143,13) 5(-143,-13) 6(-143,-38) 7(-143,-64) 8(-143,-90) 9(143,-90) 10(143,-64) 11(143,-38) 12(143,-13) 13(143,13) 14(143,38) 15(143,64) 16(143,90)
  silkscreen extent -110,-128 228,128, body extent -154,-128 154,128, height 79
MCP2562FD-E/SN [mm]
  rrect25% 1.9x0.6 smd paste+0 mask+0.05: 1(-2.455,1.905) 2(-2.455,0.635) 3(-2.455,-0.635) 4(-2.455,-1.905) 5(2.455,-1.905) 6(2.455,-0.635) 7(2.455,0.635) 8(2.455,1.905)
  silkscreen extent -4.3,-2.45 1.18,2.45, body extent -3,-2.45 3,2.45, height 1.75
"MMBT3904 RFG" [mm]
  rrect25% 1.32x0.59 smd paste+0 mask+0.05: 1(-1.016,1.041) 2(-1.016,-1.016) 3(1.015,0)
  silkscreen extent -2.6,-1.46 0.65,1.46, body extent -1.23,-1.52 1.37,1.52, height 1.3
OMRON-B3U-1000_V [mm] "SMD, 2-Leads, Body 3x2.5mm"
  rect 0.8x1.7 smd: 1(-1.7,0) 2(1.7,0)
  silkscreen extent -2.77,-1.25 1.5,1.25, body extent -1.5,-1.25 1.5,1.25, height 1.75
RH100-25.000-10-F-1010-EXT-TR [mm]
  rect 1.4x1.1 smd: 1(-1.1,-0.8) 2(1.1,-0.8) 3(1.1,0.8) 4(-1.1,0.8)
  silkscreen extent -2.6,-1.25 0.08,1.25, body extent -1.6,-1.25 1.6,1.25, height 0.75
RT7235GQW [mm]
  rrect25% 0.81x0.26 smd: 1(-1.445,1) 2(-1.445,0.5) 3(-1.445,0) 4(-1.445,-0.5) 5(-1.445,-1) 6(1.445,-1) 7(1.445,-0.5) 8(1.445,0) 9(1.445,0.5) 10(1.445,1)
  rect 1.63x2.48 smd paste-2: 11(0,0)
  silkscreen extent -2.55,-1.56 1.53,1.56, body extent -1.5,-1.5 1.5,1.5, height 0.8
SS14 [mm]
  rect 1.8x1.7 smd: 1(-2.05,0) 2(2.05,0)
  silkscreen extent -2.3,-1.2 2.3,1.2, body extent -1.8,-0.9 1.8,0.9, height 1.43
STM32F437ZIT6 [mm]
  rrect25% 1.47x0.28 smd paste+0 mask+0.05: 1(-10.67,8.75) 2(-10.67,8.25) 3(-10.67,7.75) 4(-10.67,7.25) 5(-10.67,6.75) 6(-10.67,6.25) 7(-10.67,5.75) 8(-10.67,5.25) 9(-10.67,4.75) 10(-10.67,4.25) 11(-10.67,3.75) 12(-10.67,3.25) 13(-10.67,2.75) 14(-10.67,2.25) 15(-10.67,1.75) 16(-10.67,1.25) 17(-10.67,0.75) 18(-10.67,0.25) 19(-10.67,-0.25) 20(-10.67,-0.75) 21(-10.67,-1.25) 22(-10.67,-1.75) 23(-10.67,-2.25) 24(-10.67,-2.75) 25(-10.67,-3.25) 26(-10.67,-3.75) 27(-10.67,-4.25) 28(-10.67,-4.75) 29(-10.67,-5.25) 30(-10.67,-5.75) 31(-10.67,-6.25) 32(-10.67,-6.75) 33(-10.67,-7.25) 34(-10.67,-7.75) 35(-10.67,-8.25) 36(-10.67,-8.75) 73(10.67,-8.75) 74(10.67,-8.25) 75(10.67,-7.75) 76(10.67,-7.25) 77(10.67,-6.75) 78(10.67,-6.25) 79(10.67,-5.75) 80(10.67,-5.25) 81(10.67,-4.75) 82(10.67,-4.25) 83(10.67,-3.75) 84(10.67,-3.25) 85(10.67,-2.75) 86(10.67,-2.25) 87(10.67,-1.75) 88(10.67,-1.25) 89(10.67,-0.75) 90(10.67,-0.25) 91(10.67,0.25) 92(10.67,0.75) 93(10.67,1.25) 94(10.67,1.75) 95(10.67,2.25) 96(10.67,2.75) 97(10.67,3.25) 98(10.67,3.75) 99(10.67,4.25) 100(10.67,4.75) 101(10.67,5.25) 102(10.67,5.75) 103(10.67,6.25) 104(10.67,6.75) 105(10.67,7.25) 106(10.67,7.75) 107(10.67,8.25) 108(10.67,8.75)
  rrect25% 0.28x1.47 smd paste+0 mask+0.05: 37(-8.75,-10.67) 38(-8.25,-10.67) 39(-7.75,-10.67) 40(-7.25,-10.67) 41(-6.75,-10.67) 42(-6.25,-10.67) 43(-5.75,-10.67) 44(-5.25,-10.67) 45(-4.75,-10.67) 46(-4.25,-10.67) 47(-3.75,-10.67) 48(-3.25,-10.67) 49(-2.75,-10.67) 50(-2.25,-10.67) 51(-1.75,-10.67) 52(-1.25,-10.67) 53(-0.75,-10.67) 54(-0.25,-10.67) 55(0.25,-10.67) 56(0.75,-10.67) 57(1.25,-10.67) 58(1.75,-10.67) 59(2.25,-10.67) 60(2.75,-10.67) 61(3.25,-10.67) 62(3.75,-10.67) 63(4.25,-10.67) 64(4.75,-10.67) 65(5.25,-10.67) 66(5.75,-10.67) 67(6.25,-10.67) 68(6.75,-10.67) 69(7.25,-10.67) 70(7.75,-10.67) 71(8.25,-10.67) 72(8.75,-10.67) 109(8.75,10.67) 110(8.25,10.67) 111(7.75,10.67) 112(7.25,10.67) 113(6.75,10.67) 114(6.25,10.67) 115(5.75,10.67) 116(5.25,10.67) 117(4.75,10.67) 118(4.25,10.67) 119(3.75,10.67) 120(3.25,10.67) 121(2.75,10.67) 122(2.25,10.67) 123(1.75,10.67) 124(1.25,10.67) 125(0.75,10.67) 126(0.25,10.67) 127(-0.25,10.67) 128(-0.75,10.67) 129(-1.25,10.67) 130(-1.75,10.67) 131(-2.25,10.67) 132(-2.75,10.67) 133(-3.25,10.67) 134(-3.75,10.67) 135(-4.25,10.67) 136(-4.75,10.67) 137(-5.25,10.67) 138(-5.75,10.67) 139(-6.25,10.67) 140(-6.75,10.67) 141(-7.25,10.67) 142(-7.75,10.67) 143(-8.25,10.67) 144(-8.75,10.67)
  silkscreen extent -12.54,-10 10,10, body extent -11,-11 11,11, height 1.59
STMPS2141STR [mm]
  rrect50% 1.1x0.6 smd: 1(-1.3,0.95) 2(-1.3,0) 3(-1.3,-0.95) 4(1.3,-0.95) 5(1.3,0.95)
  silkscreen extent -2.52,0.78 -2.08,1.22, body extent -1.4,-1.45 1.4,1.45, height 1.45
TLV75533PDRVR [mm]
  rrect35% 0.45x0.3 smd: 1(-0.975,0.65) 2(-0.975,0) 3(-0.975,-0.65) 4(0.975,-0.65) 5(0.975,0) 6(0.975,0.65)
  rect 1x1.6 smd paste-2: 3(0,0)
  silkscreen extent -1.97,-1.12 1,1.12, body extent -1,-1 1,1, height 0.8
USBLC6-2SC6 [mm]
  rrect25% 1.21x0.59 smd: 1(-1.255,0.95) 2(-1.255,0) 3(-1.255,-0.95) 4(1.255,-0.95) 5(1.255,0) 6(1.255,0.95)
  silkscreen extent -2.66,-1.57 0.81,1.57, body extent -1.4,-1.46 1.4,1.46, height 1.44
?#1 [mm]
  rrect25% 0.6x0.31 smd mask+0: 1(-1.4,0.975) 2(-1.4,0.325) 3(-1.4,-0.325) 4(-1.4,-0.975) 5(1.4,-0.975) 6(1.4,-0.325) 7(1.4,0.325) 8(1.4,0.975)
  rect 1.65x2.4 smd paste-2 mask+0.05: 5(0,0)
  silkscreen extent -2.43,-1.5 1.5,1.5, body extent -1.5,-1.5 1.5,1.5, height 1
?#2 [mm]
  rrect25% 0.6x0.31 smd mask+0: 1(-1.4,0.975) 2(-1.4,0.325) 3(-1.4,-0.325) 4(-1.4,-0.975) 5(1.4,-0.975) 6(1.4,-0.325) 7(1.4,0.325) 8(1.4,0.975)
  rect 1.65x2.4 smd paste-2 mask+0.05: 9(0,0)
  silkscreen extent -2.43,-1.5 1.5,1.5, body extent -1.5,-1.5 1.5,1.5, height 1

## Part data
B1: "TRANS NPN 40V 0.2A SOT23-3", MPN=MMBT3904
C1 C8 C18 C63: library part "CON SMD 402", "CON SMD 402", MPN=CL05A104KA5NNNC, Package=0402
C2 C3 C4 C5 C6 C7 C11 C16 C19 C20 C21 C28 C30 C31 C33 C36 C37 C38 C39 C40 C41 C42 C43 C44 C45 C46 C47 C48 C50 C51 C52 C55 C56 C57 C58: library part "CAP SMD 402", "CAP SMD 402", MPN=CL05A104KA5NNNC, Package=0402
C9 C10 C24: library part "CON SMD 0603", "CON SMD 0603", MPN=GRM188R61E106MA73D, Pacage=0603
C12: library part "CAP SMD 402", "CAP SMD 402", MPN=C0603C392J3GACTU, Package=0402
C13 C14: library part "CAP SMD 0805", "CAP SMD 0805", MPN=CL10A226MO7JZNC, Package=0805
C15: library part "CAP SMD 402", "CAP SMD 402", MPN=C0402C153J5RECTU, Package=0402
C17 C23 C53 C54 C61: library part "CAP SMD 402", "CAP SMD 402", MPN=GRM155R6YA105KE11D, Package=0402
C22 C32: library part "CAP SMD 402", "CAP SMD 402", MPN=C1005X5R1V225K050BC, Package=0402
C25: library part "CAP SMD 402", "CAP SMD 402", MPN=C0402C103K5RECAUTO, Package=0402
C26 C27: library part "CAP SMD 402", "CAP SMD 402", MPN=GCM1555C1H470JA16D, Package=0402
C29: library part "CAP SMD 0603", "CAP SMD 0603", MPN=GRM188R61E475KE11D, Pacage=0603
C34 C35 C59 C62: library part "CAP SMD 402", "CAP SMD 402", MPN=GRM1555C1H150JA01D, Package=0402
C49: library part "CAP SMD 0603", "CAP SMD 0603", MPN=GRM188R61E106MA73D, Pacage=0603
C60: library part "CAP SMD 402", "CAP SMD 402", MPN=GRM1555C1H471JA01D, Package=0402
C64: library part "CAP SMD 402", "CAP SMD 402", MPN=C0402C472K5RECAUTO, Package=0402
D1 D2 D3 D4 D5: "LED RED CLEAR 0603 SMD", MPN=150060RS75000
D6: library part SS14, "DIODE SCHOTTKY 40V 1A DO214AC", MPN=SS14
J1: library part 0901362108, "CONN HEADER R/A 8POS 2.54MM", MPN=0901362108
J2 J3 J7 J8: library part 0901362102, "CONN HEADER R/A 2POS 2.54MM", MPN=0901362102
J4 J6: library part 0901362104, "CONN HEADER R/A 4POS 2.54MM", MPN=0901362104
J5: library part 87583-3010RPALF, "CONN RCPT USB2.0 TYPEA 4P SMD RA", MPN=87583-3010RPALF
J9: "CONN JACK 1PORT PCB", MPN=ARJM11C7-009-AB-EW2
J10: "CONN RCPT USB2.0 MICRO B SMD R/A", MPN=10118192-0001LF
J11: "CONN HEADER R/A 2POS 2.54MM", MPN=0901362102
J12: library part 0901362110, "CONN HEADER R/A 10POS 2.54MM", MPN=0901362110
J13: "WR-PHD 2.54 MM SOCKET HEADER 4 P", MPN=61300411821
L1: "FIXED IND 2.2UH 850MA 175.5 MOHM", MPN=BRL2518T2R2M
M1: library part IRLML6402, "MOSFET N-CH 12V 2.1A 3PICOSTAR", MPN=IRLML6402
R1: library part "RES SMD 0402", "RES SMD 0402", Package=0402
R2: library part "RES SMD 0402", "RES SMD 0402", MPN=ERJ-2RKF1003X, Package=0402
R3: library part "RES SMD 0402", "RES SMD 0402", MPN=ERA-2AEB183X, Package=0402
R4 R5 R12: library part "RES SMD 0402", "RES SMD 0402", MPN=ERJ-2RKF1200X, Package=0402
R6: library part "RES SMD 0603", "RES SMD 0603", MPN=MI0603J601R-10, Package=0603
R7 R8: library part "RES SMD 0402", "RES SMD 0402", MPN=RC0402FR-0727RL, Package=0402
R9 R10 R28: library part "RES SMD 0402", "RES SMD 0402", MPN=RMCF0402FT4K70, Package=0402
R11 R13 R14 R15 R16 R17 R18 R20 R29 R37: library part "RES SMD 0402", "RES SMD 0402", MPN=RNCF0402BTE10K0, Package=0402
R19: library part "RES SMD 0402", "RES SMD 0402", MPN=CR0402FC1KS001, Package=0402
R21 R27: library part "RES SMD 0402", "RES SMD 0402", MPN=RMCF0402FT270R, Package=0402
R22 R23 R24 R25: library part "RES SMD 0402", "RES SMD 0402", MPN=RG1005N-49R9-W-T1, Package=0402
R26: library part "RES SMD 0603", "RES SMD 0603", MPN=RT0603BRD0712K1L, Package=0603
R30: library part "RES SMD 0402", "RES SMD 0402", MPN=CR0402JC1MS001, Package=0402
R31: library part "RES SMD 0805", "RES SMD 0805", MPN=RG2012L-472-L-T05, Package=0805
R32 R33 R34 R35 R36: library part "RES SMD 0402", "RES SMD 0402", MPN=RC0402FR-13300RL, Package=0402
SW2: library part CMP-011-00000-2, "Tactile Switch, SPST-NO, 0.05 A, 12 V, -25 to 70 degC, 2-Pin SMD, RoHS, Tape and Reel", MPN=B3U-1000P
U1: "IC TRANSCEIVER FULL 1/1 16SSOP (±5V i±15V - 3kΩ 7kΩ)", MPN=MAX3221EIDBR
U2: "IC TRANSCEIVER HALF 1/1 8SON (-7V +12V - 54 Ω)", MPN=SN65HVD78DRBT
U3: "IC REG BUCK ADJ 5A 10WDFN", MPN=RT7235GQW
U4: "IC TRANSCEIVER 1/1 8SOIC", MPN=MCP2562FD-E/SN
U5: "SENSOR PRESSURE HUMIDITY TEMP", MPN=BME280
U6: "IC TRANSCEIVER FULL 1/1 8SOIC", MPN=SP3077EEN-L
U7: "MCU 32-bit STM32F ARM Cortex M4 RISC 2048KB Flash 2.5V/3.3V 144-Pin LQFP Tray (0V - 3.3V, 25Ω - 40kΩ)", Case/Package=LFQFP, Clock Frequency=180MHz, Manufacturer=STMicroelectronics, Max Operating Temperature=85°C, Max Supply Current=125mA, Max Supply Voltage=3.6V, Min Operating Temperature=-40°C, Min Supply Voltage=1.7V, Nominal Supply Current=1.7µA, Nominal Supply Voltage (DC)=3.3V, Temperature Grade=Industrial, ADC Channels (Resolution)="24-Ch 12-Bit", Category=Microcontrollers, China RoHS=Compliant, ComponentLink1Description=https://datasheet.octopart.com:443/STM32F437ZIT6-STMicroelectronics-datasheet-181247468.pdf?src-supplier=IHS, ComponentLink1URL=https://datasheet.octopart.com:443/STM32F437ZIT6-STMicroelectronics-datasheet-181247468.pdf?src-supplier=IHS, ComponentLink2Description=https://datasheet.octopart.com:443/STM32F437ZIT6-STMicroelectronics-datasheet-109682747.pdf?src-supplier=ODG+(Origin+Data+Global), ComponentLink2URL=https://datasheet.octopart.com:443/STM32F437ZIT6-STMicroelectronics-datasheet-109682747.pdf?src-supplier=ODG+(Origin+Data+Global), ComponentLink3Description=https://datasheet.octopart.com:443/STM32F437ZIT6-STMicroelectronics-datasheet-27203479.pdf?src-supplier=Upverter, ComponentLink3URL=https://datasheet.octopart.com:443/STM32F437ZIT6-STMicroelectronics-datasheet-27203479.pdf?src-supplier=Upverter, ComponentLink4Description=https://datasheet.octopart.com:443/STM32F437ZIT6-STMicroelectronics-datasheet-16349512.pdf?src-supplier=Future+Electronics, ComponentLink4URL=https://datasheet.octopart.com:443/STM32F437ZIT6-STMicroelectronics-datasheet-16349512.pdf?src-supplier=Future+Electronics, ComponentLink5Description=https://datasheet.octopart.com:443/STM32F437ZIT6-STMicroelectronics-datasheet-62069530.pdf?src-supplier=STMicroelectronics, ComponentLink5URL=https://datasheet.octopart.com:443/STM32F437ZIT6-STMicroelectronics-datasheet-62069530.pdf?src-supplier=STMicroelectronics, ComponentLink6Description=https://datasheet.octopart.com:443/STM32F437ZIT6-STMicroelectronics-datasheet-34148158.pdf?src-supplier=STMicroelectronics, ComponentLink6URL=https://datasheet.octopart.com:443/STM32F437ZIT6-STMicroelectronics-datasheet-34148158.pdf?src-supplier=STMicroelectronics, ComponentLink7Description=https://datasheet.octopart.com:443/STM32F437ZIT6-STMicroelectronics-datasheet-66001099.pdf?src-supplier=HQonline, ComponentLink7URL=https://datasheet.octopart.com:443/STM32F437ZIT6-STMicroelectronics-datasheet-66001099.pdf?src-supplier=HQonline, ComponentLink8Description=https://datasheet.octopart.com:443/STM32F437ZIT6-STMicroelectronics-datasheet-38329676.pdf?src-supplier=Newark, ComponentLink8URL=https://datasheet.octopart.com:443/STM32F437ZIT6-STMicroelectronics-datasheet-38329676.pdf?src-supplier=Newark, ComponentLink9Description=https://datasheet.octopart.com:443/STM32F437ZIT6-STMicroelectronics-datasheet-21407670.pdf?src-supplier=Farnell, ComponentLink9URL=https://datasheet.octopart.com:443/STM32F437ZIT6-STMicroelectronics-datasheet-21407670.pdf?src-supplier=Farnell, ComponentLink10Description=https://datasheet.octopart.com:443/STM32F437ZIT6-STMicroelectronics-datasheet-16809516.pdf?src-supplier=Farnell, ComponentLink10URL=https://datasheet.octopart.com:443/STM32F437ZIT6-STMicroelectronics-datasheet-16809516.pdf?src-supplier=Farnell, ComponentLink11Description=https://datasheet.octopart.com:443/STM32F437ZIT6-STMicroelectronics-datasheet-62046042.pdf?src-supplier=element14+APAC, ComponentLink11URL=https://datasheet.octopart.com:443/STM32F437ZIT6-STMicroelectronics-datasheet-62046042.pdf?src-supplier=element14+APAC, Core Architecture="ARM Cortex-M4", Country of Origin="Mainland China, Malaysia, Taiwan", DAC Channels (Resolution)="2-Ch 12-Bit", Data Bus Width=32b, EEPROM Memory Size=0B, Export Control Classification Number (ECCN) Code=5A992.C, Flash Memory Size=2MB, Frequency=180MHz, Harmonized Tariff Schedule (HTS) Code=8542.31.00.25, Height - Seated (Max)=1.6mm, Lead Free="Lead Free", Length=20mm, Lifecycle Status=Production, Manufacturer Part Number=STM32F437ZIT6, Memory Format=FLASH, Memory Size=2MB, MPN=STM32F437ZIT6, Number of A/D Converters=3, Number of Channels=24, Number of D/A Converters=2, Number of Programmable I/O=114, Number of SPI Channels=6, Number of Terminals=144, Number of Timers/Counters=2, Number of UART Channels=4, Number of USART Channels=4, Number of I2C Channels=3, Number of I/Os=114, Oscillator Type=Internal, Packaging=Bulk, Peripherals=POR, Pins=144, Pricing="1=17,03, 10=13,98, 100=12,67, 250=11,67, 500=10,73, 1000=9,86, 2000=9,23 (EUR)", Radiation Hardening=No, RAM Size=256kB, REACH SVHC=Yes, RoHS=Compliant, Schedule B="8542310000, 8542310000|8542310000|8542310000|8542310000|8542310000", Supplier=Farnell, Supplier Part Number=STM32F437ZIT6, Terminal Pitch=500µm, Watchdog Timer=Yes, Width=20mm, Interface="Ethernet, IrDA, LIN, USB", Introduction Date=2013-02-13
U8: "IC REG LINEAR 3.3V 500MA 6-WSON", MPN=TLV75533PDRVR
U9: "IC USB SERIAL BASIC UART 12DFN (0V - 3.3V, 27Ω - 90Ω)", MPN=FT234XD-R
U10: "IC TRANSCEIVER HALF 1/1 8SON", MPN=SN65HVD78DRBT
U11: "IC TRANSCEIVER FULL 1/1 24SQFN", MPN=LAN8742AI-CZ-TR
U12: "TVS DIODE 5.25VWM 17VC SOT23-6", MPN=USBLC6-2SC6
U13: "IC PWR SWITCH N-CHAN 1:1 SOT23-5", MPN=STMPS2141STR
X1 X2: "CRYSTAL 25.0000MHZ 10PF SMD", MPN=RH100-25.000-10-F-1010-EXT-TR

## Via types
v1: diameter 19.68, hole 11.81, Top Layer to Bottom Layer, tented both sides, 284 vias

## Nets (pads, with @x,y where several pads share a name; then routed paths per layer and width w, separated by ;. In a path a pad name is that pad's centre, name@x,y a point inside that pad or via, vN(x,y) a via of type N, cw(c..) or ccw(c..) an arc to the next point about the centre after c; other vN are vias at no path point)
3.3V: C1.2 C4.2 C5.2 C8.2 C18.2 C20.2 C21.1 C24.2 C36.1 C37.1 C38.1 C39.1 C40.1 C41.1 C42.1 C43.1 C44.1 C45.1 C46.1 C47.1 C48.1 C49.2 C50.1 C51.1 C52.2 C53.2 C54.2 C55.2 C56.1 C57.2 C58.2 C63.2 J1.7 J6.1 J9.4 J9.5 J9.11 J12.1 J13.3 R9.2 R10.2 R13.2 R15.2 R16.2 R17.2 R22.1 R23.1 R24.1 R25.1 R28.1 R29.1 R31.1 R37.1 U1.12 U1.15 U1.16 U2.2 U2.8 U4.5 U5.2 U5.6 U5.8 U6.1 U7.6 U7.17 U7.30 U7.32 U7.33 U7.39 U7.52 U7.62 U7.72 U7.84 U7.95 U7.108 U7.121 U7.131 U7.143 U7.144 U8.1 U10.8 U11.1 U11.9 U11.19 | length 4816.6
  Top Layer w5.94: U1.12@892,2928 U1.12@896.53,2923.47 ; U1.12@892.5,2927.5 947.5,2927.5 v1(948.5,2926.5) ; 1326,1660.77 1326,1662.18 ; C55.2@1340,1645 C55.2@1340,1646.77 ; C44.1@1468.23,1637.01 1471.77,1637.01 1478.84,1644.08 1478.84,1670.75 1486.99,1678.9 v1(1486.99,1681.1) 1495.45,1689.57 1554.92,1689.57 U7.32@1554.92,1709.25 ; U4.5@1606.16,693 1615,701.84 U4.5@1615,713 ; C63.2@2111.22,1125 v1(2145.67,1125) U5.6@2175,1125 ; C18.2@2117.13,1176.18 v1(2146.65,1176.18) U5.8@2175,1176.18 ; U7.108@2395.08,2319.49 2395.87,2318.7 2447.05,2318.7 v1(2447.83,2317.91) 2507.09,2317.91 C48.1@2508.86,2319.68 ; U2.2@2602.8,793.12 U2.2@2603.9,794.22 ; v1@2603.9,823.9 v1(2605,825) ; U11.1@2759.68,2343.54 2759.68,2353.09 2761.83,2355.24 2858.47,2355.24 2884.45,2381.22 2884.45,2395.2 C58.2@2886.22,2396.97 ; J9.11@3595.08,2549.25 J9.11@3595.28,2549.06 ; v1@3595.28,2500.2 v1(3595.47,2500)
  Top Layer w10: J13.3@96.46,1442.52 96.65,1442.72 253.74,1442.72 v1(253.94,1442.91) ; J6.1@480,2770 481.14,2768.86 559.88,2768.86 v1(561.02,2767.72) ; J12.1@730,3455 730.16,3454.84 730.16,3385.98 v1(730.32,3385.83) ; C5.2@744.09,2824.8 C4.2@799.21,2824.8 v1(835.63,2824.8) ; U8.1@849.5,1080 849.64,1079.86 888.64,1079.86 v1(888.78,1079.72) C24.2@933.07,1079.72 ; U1.16@892,2825 891.9,2824.9 835.73,2824.9 v1(835.63,2824.8) ; U1.15@892,2851 845.05,2851 835.81,2841.76 835.81,2824.99 v1(835.63,2824.8) ; C21.1@900.59,1854.33 900.41,1854.51 900.41,1903.64 U6.1@900.24,1903.82 v1(931.06,1903.82) ; v1(1131.91,1570.87) 1133.76,1572.72 1182.72,1572.72 C53.2@1185,1575 1190.04,1569.96 1190.04,1550.12 1200.79,1539.37 1304.65,1539.37 1338.5,1573.23 C52.2@1338.5,1575 1338.7,1574.8 1406.02,1574.8 C44.1@1468.23,1637.01 ; C54.2@1228.5,1645 1262.8,1645 1287.58,1669.78 1316.99,1669.78 1326,1660.77 C55.2@1340,1646.77 ; C55.2@1340,1645 1402.2,1645 1505.82,1748.62 U7.30@1554.92,1748.62 ; C41.1@1447.83,1986.42 1448.49,1987.07 1494.83,1987.07 v1(1495.48,1987.72) ; C51.1@1461.61,2221.46 v1(1503.94,2221.46) 1504.13,2221.26 1554.72,2221.26 U7.6@1554.92,2221.06 ; v1@1496.1,1987.11 1496.62,1987.11 1513.93,2004.41 1554.8,2004.41 U7.17@1554.92,2004.53 ; C20.2@1525.86,688.86 C20.2@1527,690 ; C20.2@1530,693 U4.5@1606.16,693 ; C37.1@1610,2477.5 1610.2,2477.3 1610.2,2445.6 v1(1610.4,2445.4) 1612.25,2443.55 1612.25,2436.76 1630.51,2418.5 U7.144@1630.51,2395.08 ; U7.143@1650.2,2395.08 1650.1,2395.18 1650.1,2444.9 v1(1650,2445) 1650.1,2445.1 1650.1,2477.4 C38.1@1650.2,2477.5 ; C43.1@1666.14,1477.36 1667.72,1478.94 1667.72,1506.3 v1(1669.29,1507.87) 1669.59,1508.17 1669.59,1554.63 U7.39@1669.88,1554.92 ; R13.2@1835,2698.5 1836.61,2700.12 1836.61,2788.39 v1(1837.6,2789.37) ; U7.131@1886.42,2395.08 1886.46,2395.12 v1(1886.5,2450) v1(1886.5,2450) v1(1886.5,2450) 1886.46,2480.96 C39.1@1886.42,2481 ; C45.1@1924.02,1442.91 1924.61,1443.5 1924.61,1488.58 v1(1925.2,1489.17) 1925.49,1489.47 1925.49,1554.63 U7.52@1925.79,1554.92 ; 1975,2709.09 1976.38,2710.47 v1(1976.38,2785.43) ; U7.121@2083.27,2395.08 U7.121@2083.78,2395.59 ; C36.1@2083.86,2491.14 2084.74,2490.26 2084.74,2469.39 v1(2085.63,2468.5) 2084.96,2467.83 2084.96,2396.61 U7.121@2083.94,2395.59 ; v1(2104.33,1378.94) 2104.33,1381.56 2120.47,1397.7 2120.47,1445.28 C46.1@2119.88,1445.87 2123.82,1449.8 U7.62@2123.82,1555.32 ; U5.2@2251.38,1150.59 2275.71,1150.59 2281.5,1144.8 ; U10.8@2253.39,659.88 U10.8@2253.39,659.88 2314.94,659.94 C1.2@2315,660 ; v1(2274.61,2704.72) 2274.8,2704.53 2274.8,2675.16 R15.2@2275,2674.96 ; U7.72@2320,1554.13 2320.98,1555.12 v1(2375,1555.12) 2375.49,1554.63 2406.2,1554.63 C42.1@2406.69,1554.13 ; R10.2@2335.63,1096.26 2333.86,1096.26 2305.99,1124.13 2302.17,1124.13 2281.5,1144.8 ; R9.2@2340.55,1197.83 2340.49,1197.89 2281.56,1197.89 v1(2281.5,1197.95) 2281.5,1144.8 ; U7.84@2395.28,1847.24 2395.47,1847.44 2452.8,1847.44 2455.22,1845.02 v1(2457.84,1845.02) ; U7.95@2396.26,2063.98 2438.98,2063.98 v1(2453.74,2049.21) 2454.33,2048.62 2492.52,2048.62 C50.1@2493.11,2048.03 ; v1(2424.21,2681.1) 2425.69,2681.1 2447.05,2659.74 R16.2@2448.53,2659.74 ; v1@2459.99,1842.87 2459.99,1843.91 2462.32,1846.23 2479.11,1846.23 C47.1@2480.32,1847.44 ; R28.1@2562.85,2239.12 2562.01,2239.96 2562.01,2262.8 v1(2561.02,2263.78) 2563.64,2263.78 2576.61,2276.75 2607.25,2276.75 2607.38,2276.61 U11.9@2633.7,2276.61 ; U2.2@2603.9,794.22 v1@2603.9,823.9 ; R37.1@2610.24,2096.06 v1(2610.24,2142.72) ; v1(2617.13,1638.12) C49.2@2617.13,1608.46 2617.32,1608.27 C40.1@2695.87,1608.27 ; U2.8@2628.39,682.88 2628.39,683.9 2629.49,685 v1(2670,685) C8.2@2710,685 ; v1(2700,2040) R29.1@2700,2100 ; U11.19@2787.24,2217.56 2788.19,2217.56 2788.31,2217.44 2788.31,2193.98 v1(2789.37,2192.91) ; v1(2862.2,2166.34) R25.1@2862.2,2196.26 2862.5,2196.56 2902.26,2196.56 C56.1@2902.56,2196.85 ; C58.2@2886.54,2396.65 2887.66,2395.53 2927.03,2395.53 v1(2927.17,2395.67) ; R22.1@2987.2,2351.97 v1(2987.2,2381.89) ; v1(3011.81,2258.86) 3011.81,2256.24 3020.69,2247.36 3020.69,2225.95 R24.1@3021.94,2224.7 3023.2,2223.45 3030.32,2223.45 3034.21,2227.34 3059.03,2227.34 C57.2@3061.02,2229.33 ; 3023.09,2250.2 R23.1@3092.52,2250.2 ; v1(3205.71,2307.09) J9.4@3245.08,2307.13 ; R31.1@3326.77,3550.59 v1(3326.77,3589.57) ; v1@3595.28,2500.2 J9.11@3595.28,2549.06
  other v1: 2284.19,659.94 1568.08,693 978.48,1049.07 1021.79,1070.73 978.48,1090.41 2300.32,1125.98 1454.01,1696.81
5V: C13.2 C14.2 C15.1 C19.2 C23.2 C28.2 C29.2 C33.2 D6.2 J12.2 J13.1 L1.2 R1.1 U4.3 U8.4 U8.6 U9.4 U13.5 | length 1160.8
  Top Layer w5.94: C23.2@784.11,1005.59 C23.2@787.61,1002.09
  Top Layer w10: R1.1@179.72,1122.05 179.86,1121.91 179.86,1087.15 C15.1@180,1087.01 180.2,1086.81 213.39,1086.81 v1(213.58,1086.61) ; U9.4@3091.14,1026.5 3091.22,1026.57 3091.22,1053.58 3097.25,1059.61 v1(3097.25,1064.48)
  Top Layer w15: J13.1@96.46,1242.52 96.65,1242.32 145.47,1242.32 v1(145.67,1242.13) ; v1(740.16,1131.18) U8.4@772.73,1131.18 ; v1(830,3345) J12.2@830,3455 ; U4.3@1665,906.31 1665.18,906.48 1665.18,962.42 v1(1665.35,962.6) 1665.45,962.7 1665.45,999.9 C19.2@1665.55,1000 ; C28.2@2950.5,1249.5 C28.2@2950,1250 2983.03,1250 3064.96,1168.07 C29.2@3064.96,1166.5 3070.56,1160.9 3129.1,1160.9 v1(3130,1160) ; v1(2961.61,706.69) D6.2@3013.78,706.69 ; v1(3224.41,3318.9) U13.5@3224.41,3339.57
  Bottom Layer w10: v1(213.58,1086.61) 243.11,1057.09 243.11,993.11 189.96,939.96 189.96,886.81 v1(229.33,847.44)
  Bottom Layer w12: v1(3097.25,1064.48) 3097.25,1127.25 v1(3130,1160)
  Bottom Layer w15: v1(740.16,1131.18) 740.16,1129.91 753.94,1116.13 v1(753.94,1066.93)
  other v1: 230.32,789.37 229.33,816.93 782.48,884.84 788.39,957.68
12V_ENABLE: R19.1 U7.4 | length 2094.9
  Top Layer w10: v1(669.29,830.71) 712.2,830.71 R19.1@712.5,831.01 ; v1(1453.35,2260.43) U7.4@1554.92,2260.43
  Bottom Layer w10: v1(669.29,830.71) 669.29,1810.04 892.72,2033.46 1226.38,2033.46 v1(1453.35,2260.43)
12VIN: C9.2 C10.2 C11.2 J11.1 M1.3 R18.1 U3.1 U3.9 U3.10 | length 180.3
  Top Layer w12: U3.1@248.11,1054.37 248.11,1099.33 264.92,1116.14 338.86,1116.14 365.5,1089.5
  other v1: 470.47,567.91 388.78,568.9 430.12,568.9 971.46,719.49 970.47,751.97 969.49,782.48 583.66,1052.17 532.48,1053.15 557.09,1053.15
CAN_L: J3.2 R4.2 U4.6 | length 281.8
  Top Layer w5.94: J3.2@1626,454 1672.99,500.99 R4.2@1672.99,633 1672.99,634.77 1665,642.76 U4.6@1665,713
CAN_P: J3.1 R4.1 U4.7 | length 267.7
  Top Layer w5.94: U4.7@1715,713 1715,638 R4.1@1710,633 1717.07,625.93 1717.07,462.93 J3.1@1726,454
CAN_RX: U4.4 U7.139 | length 1902.1
  Top Layer w5.94: U4.4@1615,906.31 v1(1615,1020) ; U7.139@1728.94,2395.08 1730.12,2393.9 1730.12,2073.22 1746.47,2056.87 v1(1747.88,2056.87)
  Bottom Layer w5.94: v1(1615,1020) 1615,955.87 1661.42,909.45 1744.09,909.45 1844.49,1009.84 1844.49,1958.85 1747.88,2055.46 v1(1747.88,2056.87)
CAN_STBY: U4.8 U7.116 | length 2203.5
  Top Layer w5.94: U4.8@1765,713 1768,710 v1(1795,710) ; v1(2180,2035) 2181.69,2036.69 U7.116@2181.69,2395.08
  Bottom Layer w5.94: v1(1795,710) 1795,706.42 1838.39,663.03 2134.55,663.03 2200,728.48 2200,1006.1 2251.91,1058.01 2251.91,1227.42 2180,1299.33 v1(2180,2035)
CAN_TX: U4.1 U7.140 | length 1517.6
  Top Layer w5.94: U7.140@1709.25,2395.08 1712.5,2391.83 1712.5,2061.12 v1(1714.57,2059.06) ; U4.1@1765,906.31 v1(1765,986.46)
  Bottom Layer w5.94: v1(1714.57,2059.06) 1739.21,2034.41 1743.74,2034.41 1765.75,2012.4 v1@1765.75,983.69
ELED_1: J9.9 U11.3 | length 1225
  Top Layer w5.94: U11.3@2720.31,2343.54 2722.46,2345.69 2722.46,2368.79 2817.23,2463.56 2848.41,2463.56 2874.02,2489.17 3081.69,2489.17 3092.52,2500 3231.3,2500 3595.08,2136.22 J9.9@3595.08,2015
ELED_2: R27.1 U11.2 | length 124.1
  Top Layer w5.94: U11.2@2740,2343.54 2740,2354.37 2745.6,2359.97 2745.6,2362.45 2778.14,2395 R27.1@2835,2395
ELED_3: J9.12 R27.2 | length 1077.1
  Top Layer w5.94: v1(2805.79,2425.52) 2826.16,2425.52 2832.65,2432.01 R27.2@2835,2432.01 ; v1(3040.35,2557.09) 3173.23,2557.09 3315.94,2699.8 3524.45,2699.8 J9.12@3675,2549.25
  Bottom Layer w5.94: v1(2805.79,2425.52) 2807.21,2425.52 2938.77,2557.09 v1(3040.35,2557.09)
ELED_4: J9.10 R21.2 | length 98.7
  Top Layer w10: J9.10@3675,2015 3675.1,2014.9 3675.1,1916.44 R21.2@3675.2,1916.34
ETH_RESET: R29.2 U7.28 U11.15 | length 1343.4
  Top Layer w5.94: U7.28@1554.92,1787.99 2187.99,1787.99 2329.91,1929.91 v1(2329.91,1930) ; v1(2674.15,2114.87) 2676.09,2114.87 2698.23,2137.01 R29.2@2700,2137.01 2700.63,2137.64 U11.15@2700.63,2190
  Bottom Layer w5.94: v1(2329.91,1930) 2379.72,1979.81 2539.81,1979.81 2674.15,2114.15 v1(2674.15,2114.87)
EXT_PA0: J12.3 U7.34 | length 3770.4
  Top Layer w5.94: v1(334.65,2267.72) 334.65,1771.65 376.3,1730 890,1730 v1(1090,1530) ; v1@350,2335.55 350,3410 480,3540 898.19,3540 930,3508.19 J12.3@930,3455 ; v1(1189.66,1521.34) 1431.54,1521.34 1497.05,1586.85 1497.05,1646.65 1518.13,1667.73 1552.77,1667.73 U7.34@1554.92,1669.88
  Bottom Layer w5.94: v1(334.65,2267.72) 334.65,2310.82 336.23,2312.4 336.23,2330.68 339.39,2333.84 348.84,2333.84 v1(350,2335) ; v1(1090,1530) 1091.64,1530 1100.3,1521.34 v1(1189.66,1521.34)
EXT_PA3: J12.4 U7.37 | length 4031.3
  Top Layer w5.94: v1(314.13,2238.04) 316.03,2236.14 316.03,1738.1 356.3,1697.83 887.17,1697.83 v1@1080,1505 ; v1(317,2320) 317,3447 454.06,3584.06 978.4,3584.06 1020,3542.46 1020,3465 J12.4@1030,3455 ; v1(1223.43,1500) 1479.77,1500 1510.11,1530.33 1627.97,1530.33 1630.51,1532.87 U7.37@1630.51,1554.92
  Bottom Layer w5.94: v1(314.13,2238.04) 314.13,2315.49 317,2318.36 v1(317,2320) ; v1(1077.76,1506.89) 1079.75,1506.89 1086.64,1500 v1(1223.43,1500)
EXT_PB0: J12.5 U7.46 | length 4453.8
  Top Layer w5.94: v1(295.28,2268.7) 295.16,2268.58 295.16,1719.6 347.44,1667.32 879.92,1667.32 v1(1062.01,1485.24) ; v1(295.28,2360.24) 295,2360.51 295,3490 420.16,3615.16 1027.7,3615.16 1130,3512.86 J12.5@1130,3455 ; v1(1190,1475) 1190.55,1475.55 1195.48,1475.55 1222.06,1448.97 1746.17,1448.97 1807.68,1510.48 U7.46@1807.68,1554.92
  Bottom Layer w5.94: v1@292.4,2268.7 295.28,2271.57 v1(295.28,2360.24) ; v1(1062.01,1485.24) 1176.04,1485.24 1186.28,1475 v1(1190,1475)